# Altium PCB Sitara_Project_Rev_A_PCB.PcbDoc (part 1 of 9)
Units mm, origin at the board's own origin, x right, y up, seen from the top; angles counter-clockwise.
Board outline 120 x 85 mm, 8 copper layers (L1 (Sig), L2 (GND), L3 (PWR), L4 (Sig), L5 (GND), L6 (Sig), L7 (GND), L8 (Sig)), stack 1.188 mm thick; 458 components, 357 nets, 1916 pads, 1164 vias.
Unrouted connection lines stored in the file: 516.
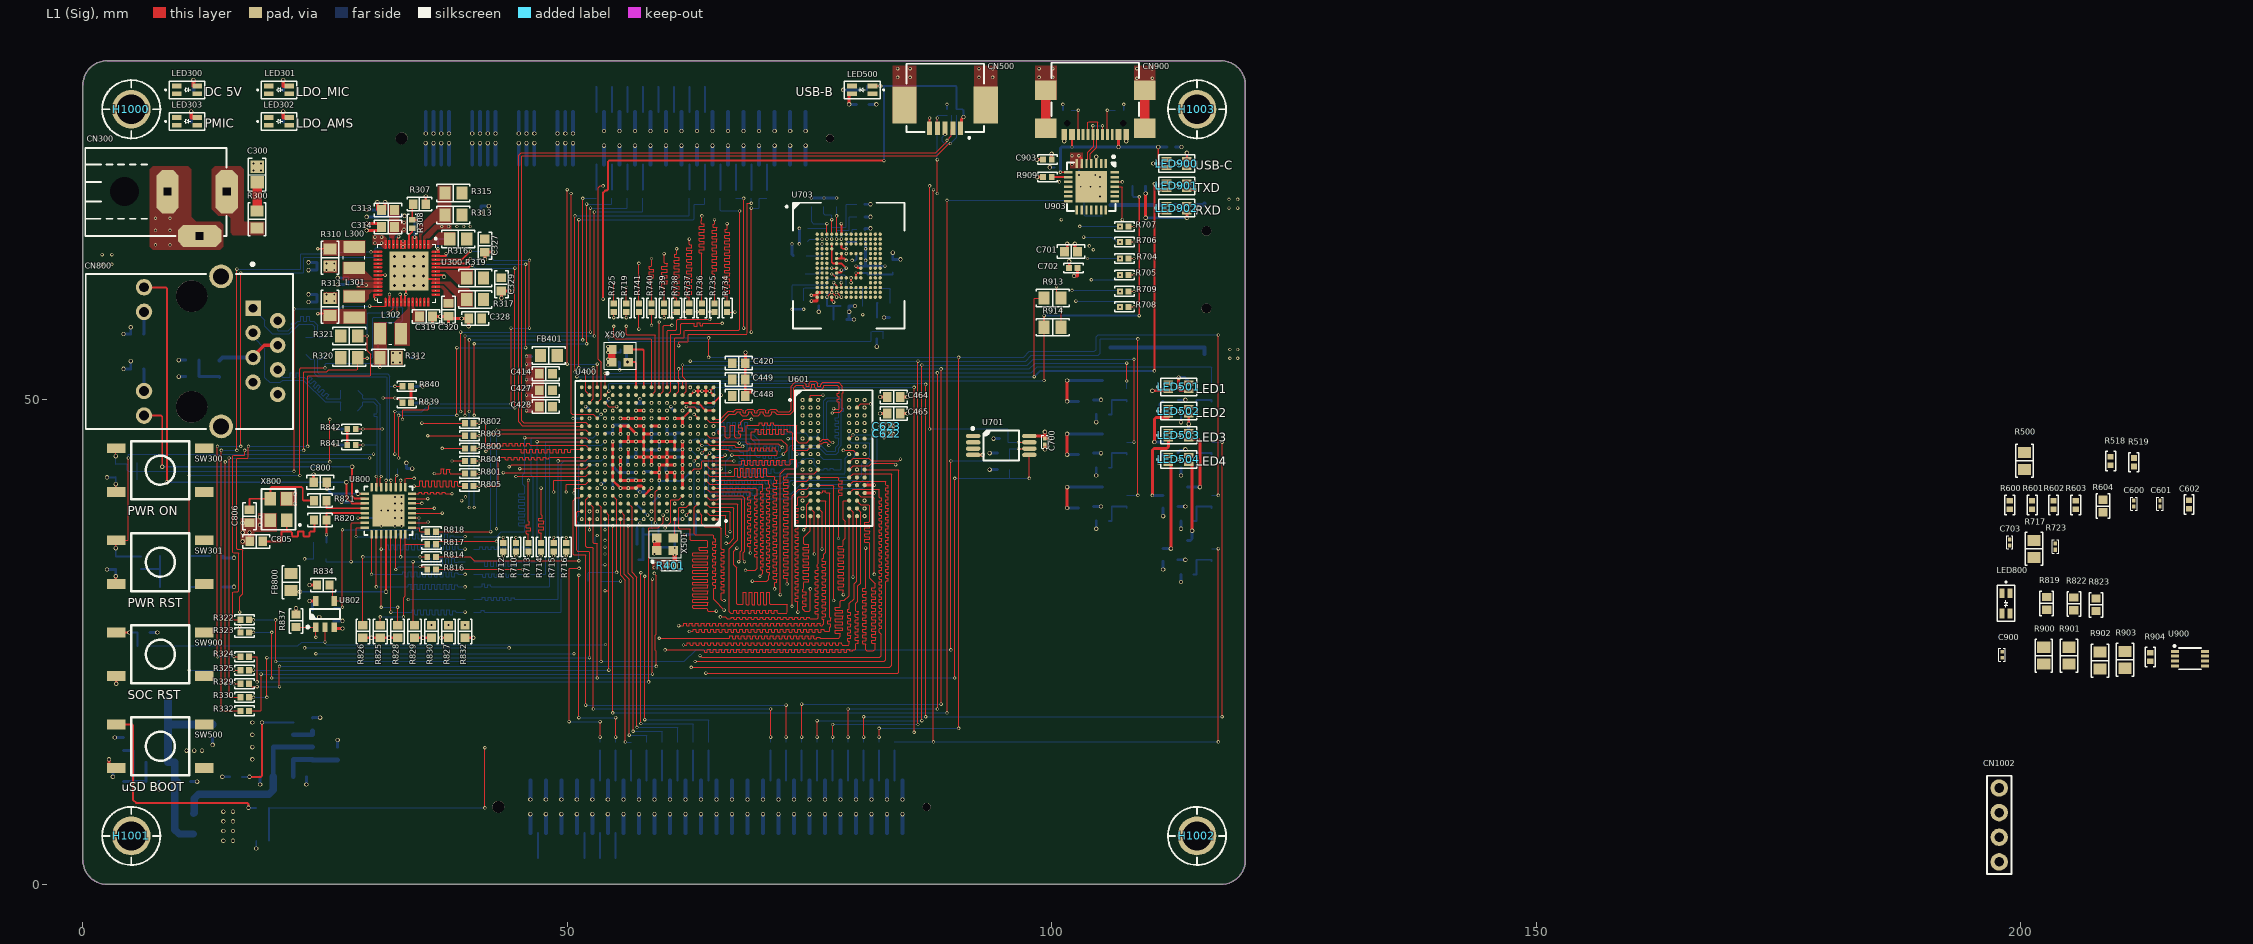
[diagram p0: L1 (Sig) view]
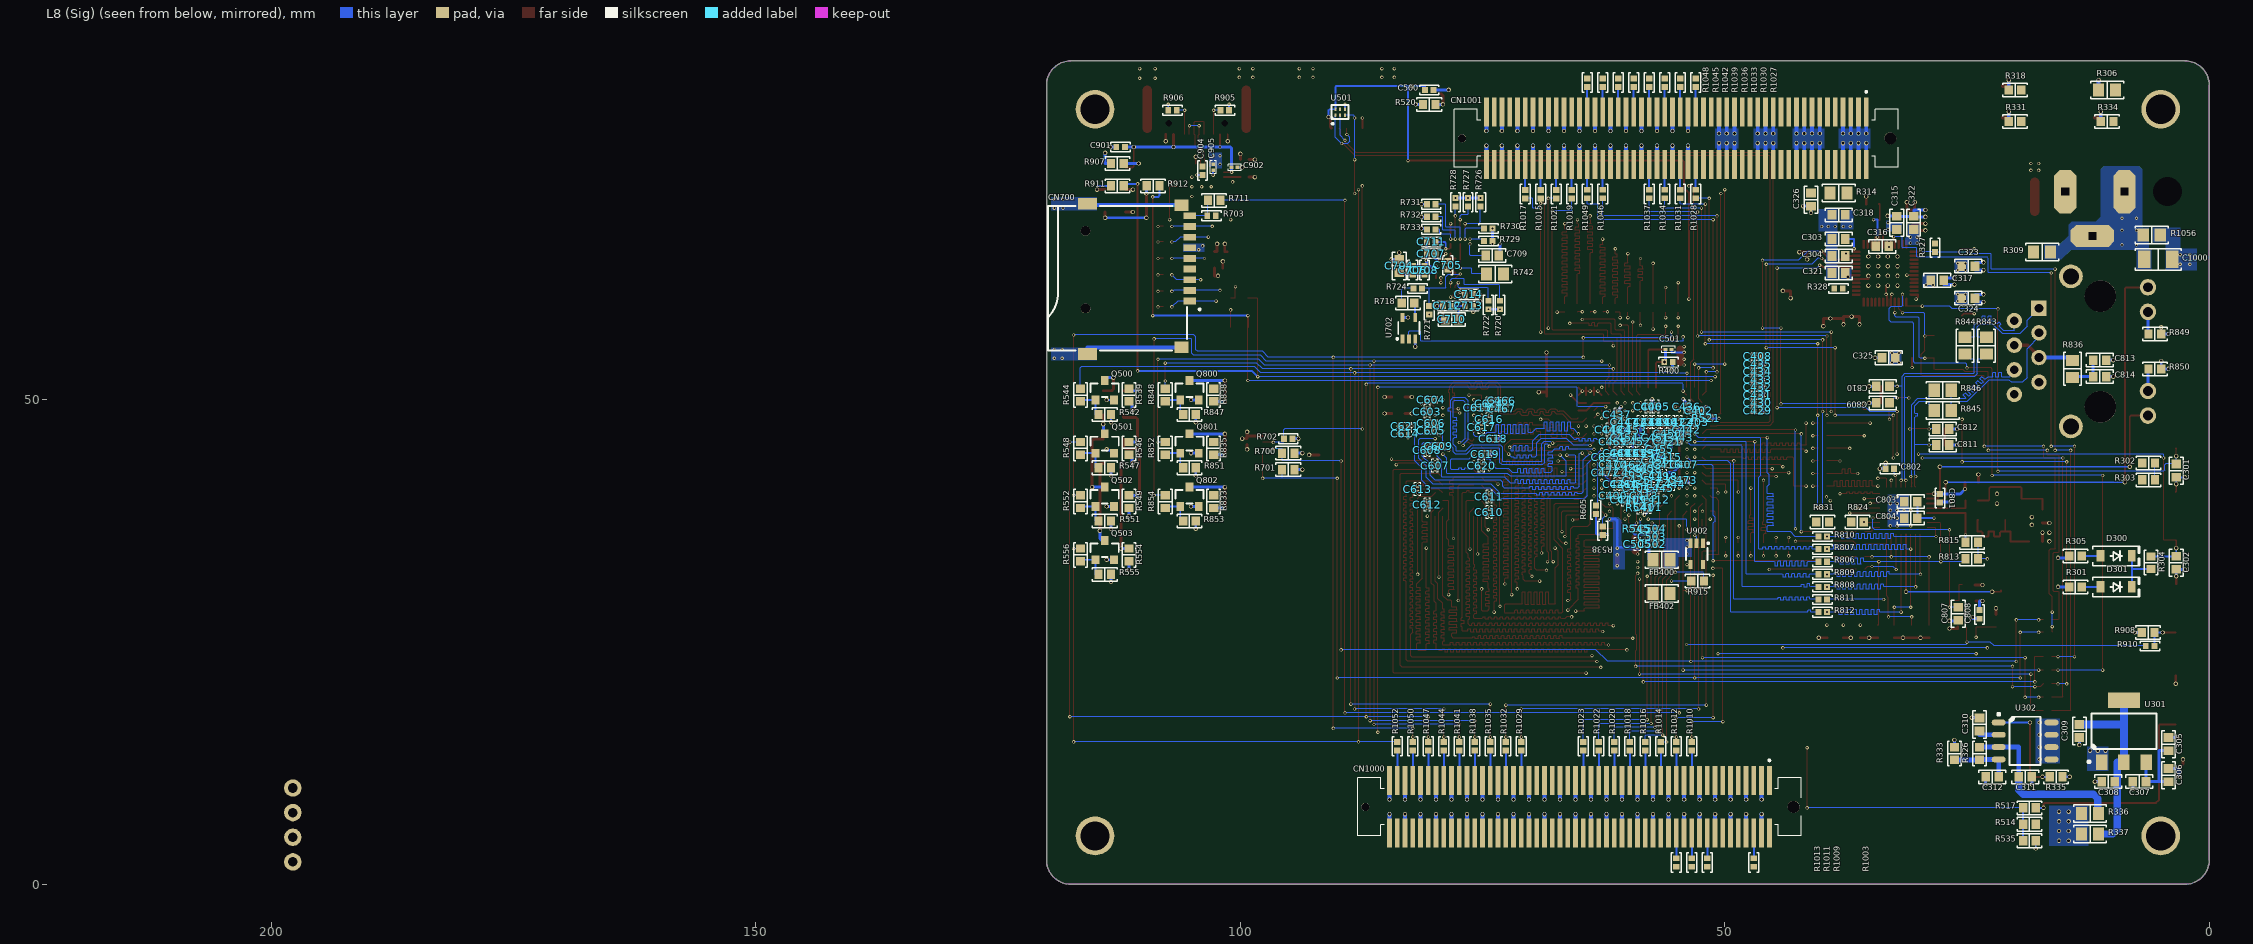
[diagram p1: L8 (Sig) view, seen from below]
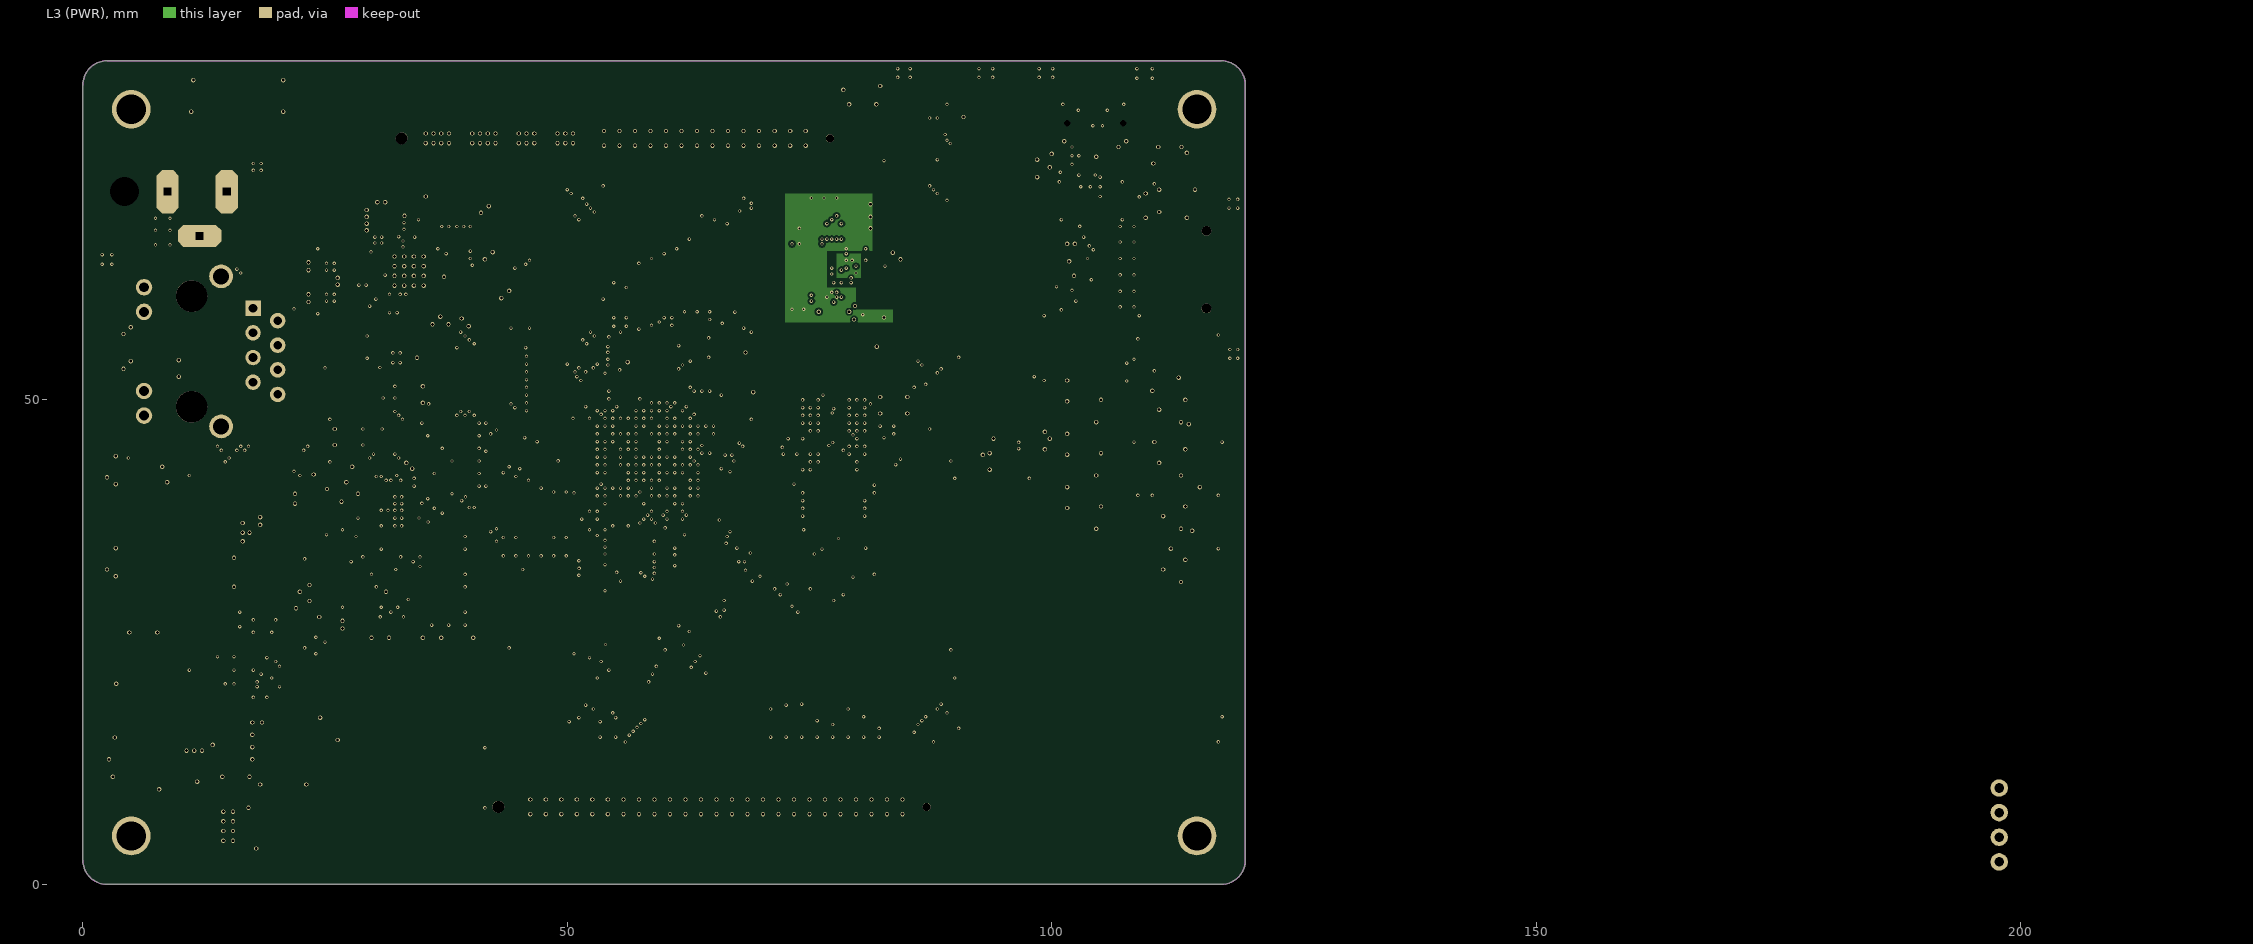
[diagram p2: L3 (PWR)]
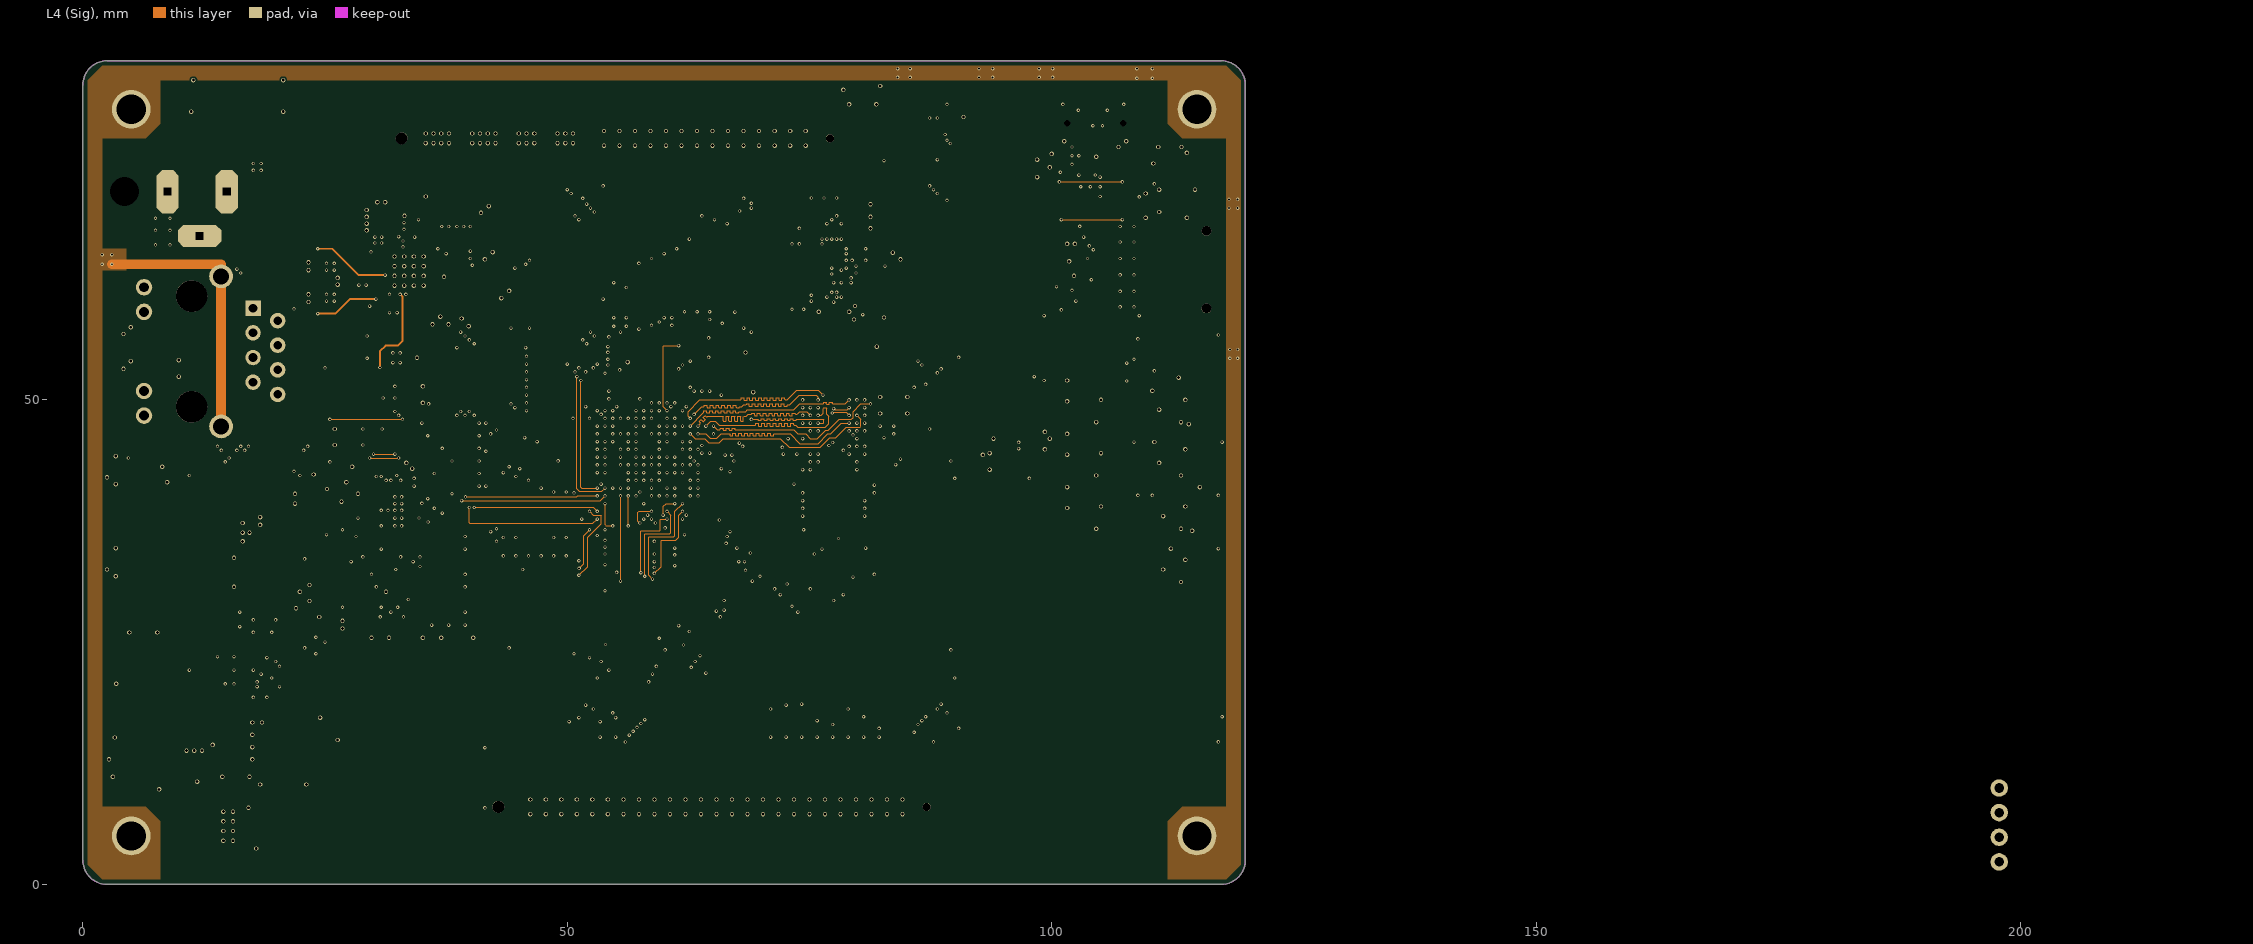
[diagram p3: L4 (Sig)]
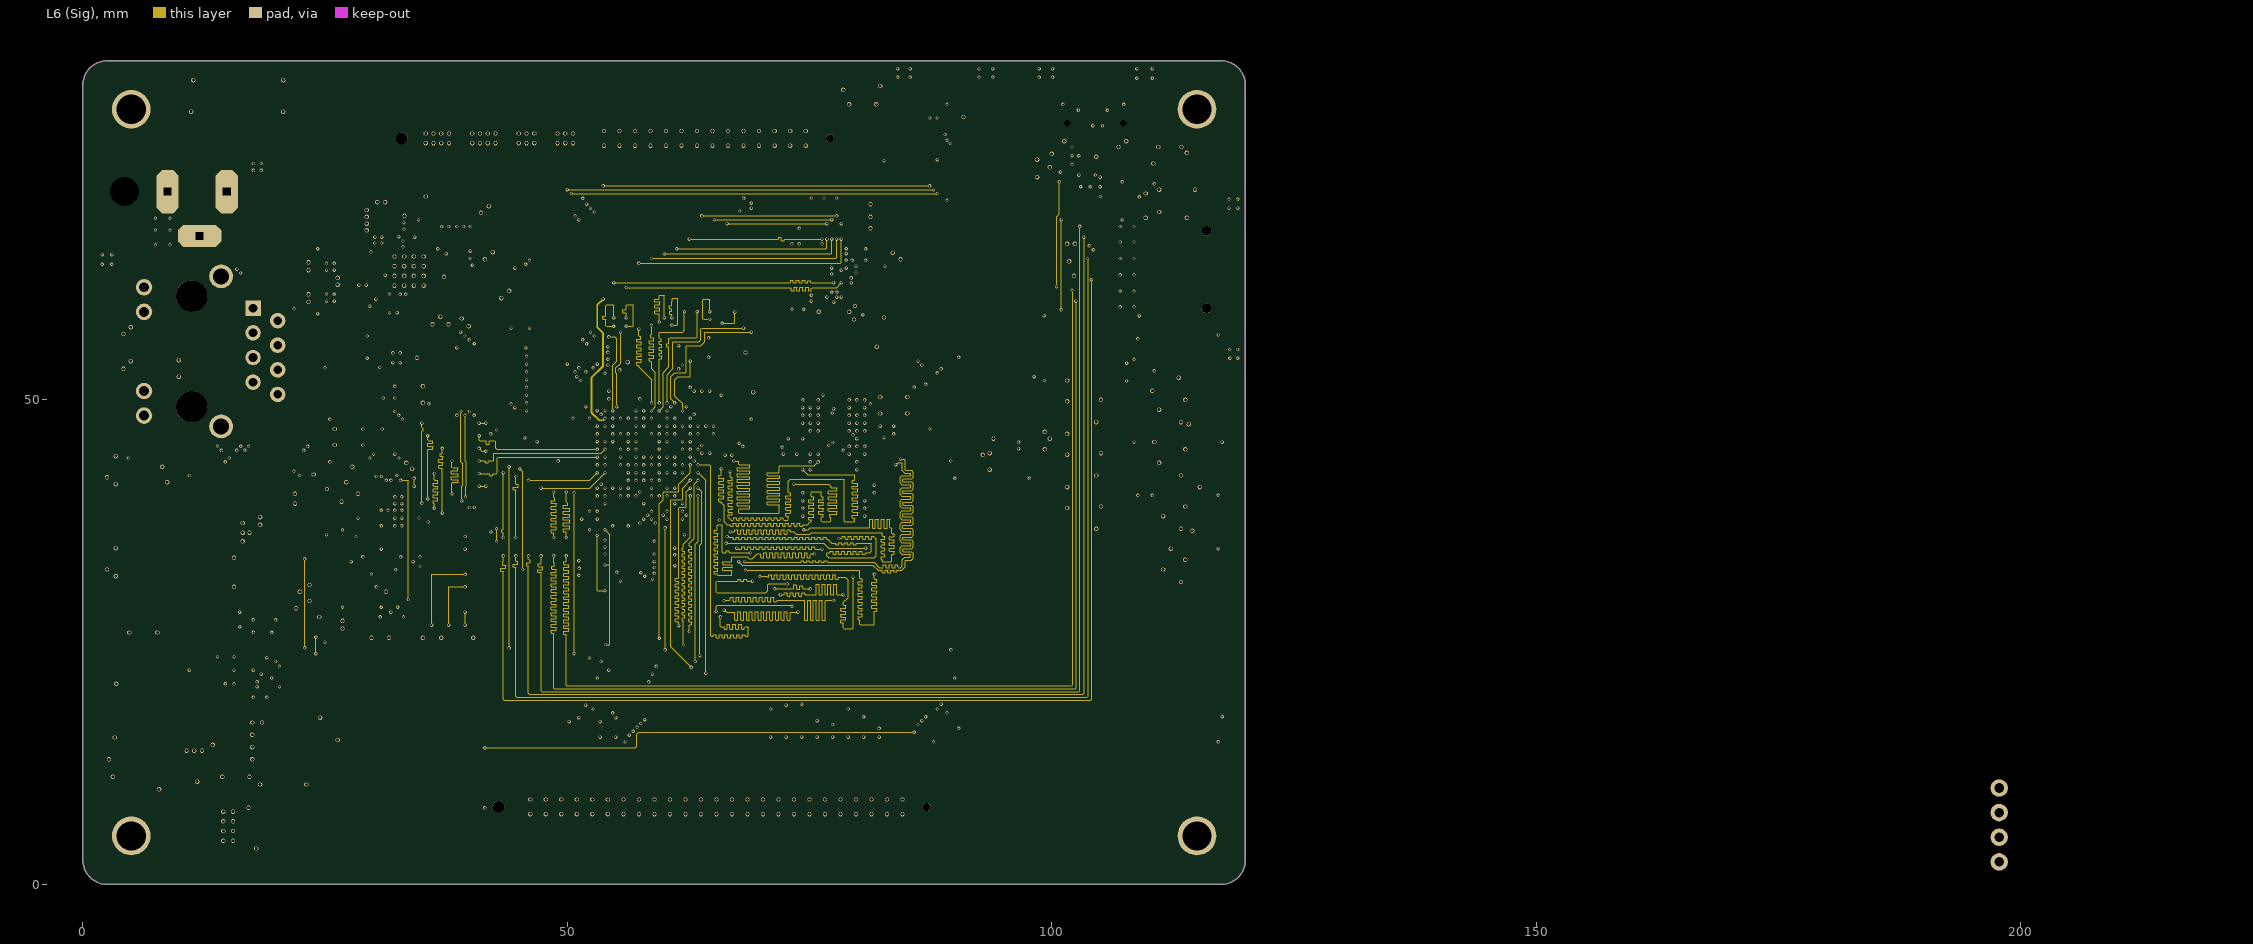
[diagram p4: L6 (Sig)]

## Layer stack, top to bottom
Top Mask: solder mask 0.015, Solder Resist, Dk 3.8
L1 (Sig): signal copper 0.035
Dielectric 1: prepreg 0.0764, 1080, Dk 3.91
L2 (GND): signal copper 0.0152
Core 1: core 0.1, FR-4, Dk 4.6
L3 (PWR): signal copper 0.0152
Dielectric 2: prepreg 0.2104, 7628, Dk 4.4
Dielectric 3: prepreg 0.0764, 1080, Dk 3.91
L4 (Sig): signal copper 0.0152
Core 2: core 0.1, FR-4, Dk 4.6
L5 (GND): signal copper 0.0152
Dielectric 4: prepreg 0.0764, 1080, Dk 3.91
Dielectric 5: prepreg 0.2104, 7628, Dk 4.4
L6 (Sig): signal copper 0.0152
Core 3: core 0.1, FR-4, Dk 4.6
L7 (GND): signal copper 0.0152
Dielectric 6: prepreg 0.0764, 1080, Dk 3.91
L8 (Sig): signal copper 0.035
Bottom Mask: solder mask 0.015, Solder Resist, Dk 3.8

## Board outline
2.5,0 cw(c2.5,2.5) 0,2.5 0,82.5 cw(c2.5,82.5) 2.5,85 117.5,85 cw(c117.5,82.5) 120,82.5 120,2.5 cw(c117.5,2.5) 117.5,0

## Design rules (kind name [scope] priority, off if disabled: settings)
BoardOutlineClearance [All] p1: gap=0.2 ignorepadtopadclearanceinfootprint=FALSE except(0.4: Arc-SplitBarrior Arc-SplitContinuation Track-SplitBarrior Track-SplitContinuation SMDPad-SplitBarrior SMDPad-SplitContinuation THPad-SplitBarrior THPad-SplitContinuation Via-SplitBarrior Via-SplitContinuation Fill-SplitBarrior Fill-SplitContinuation Poly-SplitBarrior Poly-SplitContinuation Region-SplitBarrior Region-SplitContinuation Text-SplitBarrior Text-SplitContinuation)
Clearance "Clearance Bottom Layer" [OnLayer('Bottom Layer')] p1: gap=0.203 ignorepadtopadclearanceinfootprint=TRUE except(0.254: Arc-Text Track-Text SMDPad-Text THPad-Text Via-Text Fill-Text Poly-Text Region-Text Text-Text)
Clearance "Clearance Top Layer" [OnLayer('Top Layer')] p2: gap=0.203 ignorepadtopadclearanceinfootprint=TRUE except(0.254: Arc-Text Track-Text SMDPad-Text THPad-Text Via-Text Fill-Text Poly-Text Region-Text Text-Text)
Clearance [All] p3: gap=0.2 ignorepadtopadclearanceinfootprint=FALSE except(0.1: Arc-Arc Arc-Track Arc-SMDPad Track-Track Track-SMDPad SMDPad-SMDPad; 0.127: Arc-Via Track-Via SMDPad-Via THPad-Via Via-Via; 0.198: Arc-Fill Arc-Poly Arc-Region Track-Fill Track-Poly Track-Region; 0.254: Arc-Text Track-Text SMDPad-Text THPad-Text Via-Text Fill-Text Fill-Hole Poly-Text Poly-Hole Region-Text Region-Hole Text-Text)
ComponentClearance [InComponent('C1000')] p1: gap=0.254 collisioncheckmode=3 verticalgap=0.254 showdistances=FALSE donotcheckwithout3dbody=TRUE
DiffPairsRouting [All] p1: maxlimit=0.254 minlimit=0.1 mostfreqgap=0.2 toplayer_minwidth=0.089 toplayer_maxwidth=0.4 toplayer_prefwidth=0.1 midlayer1_minwidth=0.089 midlayer1_maxwidth=0.4 midlayer1_prefwidth=0.1 midlayer2_minwidth=0.089 midlayer2_maxwidth=0.4 midlayer2_prefwidth=0.1 midlayer3_minwidth=0.089 midlayer3_maxwidth=0.4 midlayer3_prefwidth=0.1 midlayer4_minwidth=0.089 midlayer4_maxwidth=0.4 midlayer4_prefwidth=0.1 midlayer5_minwidth=0.089 midlayer5_maxwidth=0.4 midlayer5_prefwidth=0.1 midlayer6_minwidth=0.089 midlayer6_maxwidth=0.4 midlayer6_prefwidth=0.1 bottomlayer_minwidth=0.089 bottomlayer_maxwidth=0.4 bottomlayer_prefwidth=0.1 maxuncoupledlength=12.7
HoleSize [All] p1: absolutevalues=TRUE maxlimit=6.3 minlimit=0.2 maxpercent=80.000 minpercent=20.000
MatchedLengths "Schematic Matched Net Lengths_8" [InDifferentialPairClass('RJ45_RX')] p1: tolerance=25.4 checknetsindiffpair=TRUE checkdiffpairvsdiffpair=FALSE checkxsignals=FALSE checkothers=FALSE usedelayunits=TRUE delaytolerance=10.000000
MatchedLengths "Schematic Matched Net Lengths_7" [InNetClass('MII1_TX_AM3')] p2: tolerance=25.4 checknetsindiffpair=FALSE checkdiffpairvsdiffpair=TRUE checkxsignals=TRUE checkothers=TRUE usedelayunits=TRUE delaytolerance=10.000000
MatchedLengths "Schematic Matched Net Lengths_6" [InNetClass('MII1_TX_PHY')] p3: tolerance=25.4 checknetsindiffpair=FALSE checkdiffpairvsdiffpair=TRUE checkxsignals=TRUE checkothers=TRUE usedelayunits=TRUE delaytolerance=10.000000
MatchedLengths "Schematic Matched Net Lengths_5" [InNetClass('MMC1_eMMC')] p4: tolerance=25.4 checknetsindiffpair=FALSE checkdiffpairvsdiffpair=TRUE checkxsignals=TRUE checkothers=TRUE usedelayunits=TRUE delaytolerance=10.000000
MatchedLengths "Schematic Matched Net Lengths_4" [InNetClass('MMC1_AM3')] p5: tolerance=25.4 checknetsindiffpair=FALSE checkdiffpairvsdiffpair=TRUE checkxsignals=TRUE checkothers=TRUE usedelayunits=TRUE delaytolerance=10.000000
MatchedLengths "Schematic Matched Net Lengths_3" [InNetClass('MII1_RX_PHY')] p6: tolerance=25.4 checknetsindiffpair=FALSE checkdiffpairvsdiffpair=TRUE checkxsignals=TRUE checkothers=TRUE usedelayunits=TRUE delaytolerance=10.000000
MatchedLengths "Schematic Matched Net Lengths_2" [InNetClass('MII1_RX_AM3')] p7: tolerance=25.4 checknetsindiffpair=FALSE checkdiffpairvsdiffpair=TRUE checkxsignals=TRUE checkothers=TRUE usedelayunits=TRUE delaytolerance=10.000000
MatchedLengths "Schematic Matched Net Lengths_1" [InNetClass('MMC0_AM3')] p8: tolerance=25.4 checknetsindiffpair=FALSE checkdiffpairvsdiffpair=TRUE checkxsignals=TRUE checkothers=TRUE usedelayunits=TRUE delaytolerance=10.000000
MatchedLengths "Schematic Matched Net Lengths" [InDifferentialPairClass('RJ45_TX')] p9: tolerance=25.4 checknetsindiffpair=TRUE checkdiffpairvsdiffpair=FALSE checkxsignals=FALSE checkothers=FALSE usedelayunits=TRUE delaytolerance=10.000000
MatchedLengths MatchedLengths_DDR_CLOCKS_STROBES_3 [InxSignalClass('ADDR_PP1') OR InxSignalClass('DATA_BL0') OR InxSignalClass('DATA_BL1')] p10: tolerance=0 checknetsindiffpair=TRUE checkdiffpairvsdiffpair=FALSE checkxsignals=FALSE checkothers=FALSE
MatchedLengths MatchedLengths_DATA_BL1_4 [InxSignalClass('DATA_BL1')] p11: tolerance=0 checknetsindiffpair=FALSE checkdiffpairvsdiffpair=TRUE checkxsignals=TRUE checkothers=TRUE
MatchedLengths MatchedLengths_DATA_BL0_4 [InxSignalClass('DATA_BL0')] p12: tolerance=0 checknetsindiffpair=FALSE checkdiffpairvsdiffpair=TRUE checkxsignals=TRUE checkothers=TRUE
MatchedLengths MatchedLengths_ADDR_PP1_4 [InxSignalClass('ADDR_PP1')] p13: tolerance=0 checknetsindiffpair=FALSE checkdiffpairvsdiffpair=TRUE checkxsignals=TRUE checkothers=TRUE
MatchedLengths MatchedLengths_DDR_CLOCKS_STROBES_2 [InxSignalClass('ADDR_PP1') OR InxSignalClass('DATA_BL0') OR InxSignalClass('DATA_BL1')] p14: tolerance=0 checknetsindiffpair=TRUE checkdiffpairvsdiffpair=FALSE checkxsignals=FALSE checkothers=FALSE
MatchedLengths MatchedLengths_DATA_BL1_3 [InxSignalClass('DATA_BL1')] p15: tolerance=0 checknetsindiffpair=FALSE checkdiffpairvsdiffpair=TRUE checkxsignals=TRUE checkothers=TRUE
MatchedLengths MatchedLengths_DATA_BL0_3 [InxSignalClass('DATA_BL0')] p16: tolerance=0 checknetsindiffpair=FALSE checkdiffpairvsdiffpair=TRUE checkxsignals=TRUE checkothers=TRUE
MatchedLengths MatchedLengths_ADDR_PP1_3 [InxSignalClass('ADDR_PP1')] p17: tolerance=0 checknetsindiffpair=FALSE checkdiffpairvsdiffpair=TRUE checkxsignals=TRUE checkothers=TRUE
MatchedLengths MatchedLengths_DDR_CLOCKS_STROBES_1 [InxSignalClass('ADDR_PP1') OR InxSignalClass('DATA_BL0') OR InxSignalClass('DATA_BL1')] p18: tolerance=0 checknetsindiffpair=TRUE checkdiffpairvsdiffpair=FALSE checkxsignals=FALSE checkothers=FALSE
MatchedLengths MatchedLengths_DATA_BL1_2 [InxSignalClass('DATA_BL1')] p19: tolerance=0 checknetsindiffpair=FALSE checkdiffpairvsdiffpair=TRUE checkxsignals=TRUE checkothers=TRUE
MatchedLengths MatchedLengths_DATA_BL0_2 [InxSignalClass('DATA_BL0')] p20: tolerance=0 checknetsindiffpair=FALSE checkdiffpairvsdiffpair=TRUE checkxsignals=TRUE checkothers=TRUE
MatchedLengths MatchedLengths_ADDR_PP1_2 [InxSignalClass('ADDR_PP1')] p21: tolerance=0 checknetsindiffpair=FALSE checkdiffpairvsdiffpair=TRUE checkxsignals=TRUE checkothers=TRUE
MatchedLengths "Schematic Matched Net Lengths_19" [InNetClass('DDR_BL1')] p22: tolerance=25.4 checknetsindiffpair=FALSE checkdiffpairvsdiffpair=TRUE checkxsignals=TRUE checkothers=TRUE usedelayunits=TRUE delaytolerance=10.000000
MatchedLengths "Schematic Matched Net Lengths_18" [InDifferentialPairClass('PHY_TX')] p23: tolerance=25.4 checknetsindiffpair=TRUE checkdiffpairvsdiffpair=FALSE checkxsignals=FALSE checkothers=FALSE usedelayunits=TRUE delaytolerance=10.000000
MatchedLengths "Schematic Matched Net Lengths_16" [InNetClass('DDR_BL0')] p24: tolerance=25.4 checknetsindiffpair=FALSE checkdiffpairvsdiffpair=TRUE checkxsignals=TRUE checkothers=TRUE usedelayunits=TRUE delaytolerance=10.000000
MatchedLengths "Schematic Matched Net Lengths_15" [InNetClass('MMC0_MICRO_SD')] p25: tolerance=25.4 checknetsindiffpair=FALSE checkdiffpairvsdiffpair=TRUE checkxsignals=TRUE checkothers=TRUE usedelayunits=TRUE delaytolerance=10.000000
MatchedLengths "Schematic Matched Net Lengths_12" [InDifferentialPairClass('PHY_RX')] p26: tolerance=25.4 checknetsindiffpair=TRUE checkdiffpairvsdiffpair=FALSE checkxsignals=FALSE checkothers=FALSE usedelayunits=TRUE delaytolerance=10.000000
MatchedLengths "Schematic Matched Net Lengths_11" [InNetClass('DDR_ACC')] p27: tolerance=25.4 checknetsindiffpair=FALSE checkdiffpairvsdiffpair=TRUE checkxsignals=TRUE checkothers=TRUE usedelayunits=TRUE delaytolerance=10.000000
MatchedLengths MatchedLengths_DDR_CLOCKS_STROBES [InxSignalClass('ADDR_PP1') OR InxSignalClass('DATA_BL0') OR InxSignalClass('DATA_BL1')] p28: tolerance=0 checknetsindiffpair=TRUE checkdiffpairvsdiffpair=FALSE checkxsignals=FALSE checkothers=FALSE
MatchedLengths MatchedLengths_DATA_BL1_1 [InxSignalClass('DATA_BL1')] p29: tolerance=0 checknetsindiffpair=FALSE checkdiffpairvsdiffpair=TRUE checkxsignals=TRUE checkothers=TRUE
MatchedLengths MatchedLengths_DATA_BL0_1 [InxSignalClass('DATA_BL0')] p30: tolerance=0 checknetsindiffpair=FALSE checkdiffpairvsdiffpair=TRUE checkxsignals=TRUE checkothers=TRUE
MatchedLengths MatchedLengths_ADDR_PP1_1 [InxSignalClass('ADDR_PP1')] p31: tolerance=0 checknetsindiffpair=FALSE checkdiffpairvsdiffpair=TRUE checkxsignals=TRUE checkothers=TRUE
MatchedLengths MatchLengths_xSignals_U400_U601 [InxSignalClass('xSignals_U400_U601_MatchLengthsClass')] p32: tolerance=2.54 checknetsindiffpair=FALSE checkdiffpairvsdiffpair=TRUE checkxsignals=TRUE checkothers=TRUE
MatchedLengths MatchedLengths_DDR_CLOCKS_STROBES2 [InxSignalClass('ADDR_PP1_1') OR InxSignalClass('DATA_BL0') OR InxSignalClass('DATA_BL1')] p33: tolerance=0 checknetsindiffpair=TRUE checkdiffpairvsdiffpair=FALSE checkxsignals=FALSE checkothers=FALSE usedelayunits=TRUE delaytolerance=1.000000
MatchedLengths MatchedLengths_DATA_BL1 [InxSignalClass('DATA_BL1')] p34: tolerance=0 checknetsindiffpair=FALSE checkdiffpairvsdiffpair=TRUE checkxsignals=TRUE checkothers=TRUE usedelayunits=TRUE delaytolerance=10.000000
MatchedLengths MatchedLengths_DATA_BL0 [InxSignalClass('DATA_BL0')] p35: tolerance=0 checknetsindiffpair=FALSE checkdiffpairvsdiffpair=TRUE checkxsignals=TRUE checkothers=TRUE usedelayunits=TRUE delaytolerance=10.000000
MatchedLengths MatchedLengths_ADDR_PP2 [InxSignalClass('ADDR_PP2')] p36: tolerance=0 checknetsindiffpair=FALSE checkdiffpairvsdiffpair=TRUE checkxsignals=TRUE checkothers=TRUE usedelayunits=TRUE delaytolerance=10.000000
MatchedLengths MatchedLengths_DDR_CLOCKS_STROBES1 [InxSignalClass('ADDR_PP1') OR InxSignalClass('DATA_BL0') OR InxSignalClass('DATA_BL1')] p37: tolerance=0 checknetsindiffpair=TRUE checkdiffpairvsdiffpair=FALSE checkxsignals=FALSE checkothers=FALSE usedelayunits=TRUE delaytolerance=1.000000
MatchedLengths MatchedLengths_DATA_BL3 [InxSignalClass('DATA_BL3')] p38: tolerance=0 checknetsindiffpair=FALSE checkdiffpairvsdiffpair=TRUE checkxsignals=TRUE checkothers=TRUE usedelayunits=TRUE delaytolerance=10.000000
MatchedLengths MatchedLengths_DATA_BL2 [InxSignalClass('DATA_BL2')] p39: tolerance=0 checknetsindiffpair=FALSE checkdiffpairvsdiffpair=TRUE checkxsignals=TRUE checkothers=TRUE usedelayunits=TRUE delaytolerance=10.000000
MatchedLengths MatchedLengths_ADDR_PP1 [InxSignalClass('ADDR_PP1')] p40: tolerance=0 checknetsindiffpair=FALSE checkdiffpairvsdiffpair=TRUE checkxsignals=TRUE checkothers=TRUE usedelayunits=TRUE delaytolerance=10.000000
MinimumAnnularRing [All] p1: minimumring=0.076
MinimumSolderMaskSliver [All] p1: minsoldermaskwidth=0.1
PolygonConnect Default [All] p1: connectstyle=Direct reliefconductorwidth=0.508 reliefentries=4 polygonreliefangle="90 Angle" airgapwidth=0.254
RoutingCorners [All] p1: cornerstyle=Round minsetback=2.54 maxsetback=2.54
RoutingTopology RoutingTopology_DDRAddressAndControls [InNetClass('DDR_AddressAndControls')] p1: topology=Daisy_Simple
RoutingTopology [All] p2: topology=Shortest
RoutingVias [All] p1: holewidth=0.2 width=0.35 viastyle="Through Hole" minholewidth=0.2 minwidth=0.25 maxholewidth=1 maxwidth=2
SilkToSilkClearance [All] p1: silktosilkclearance=0.1
SilkToSolderMaskClearance [IsPad] p1: minsilkscreentomaskgap=0.1 clearancetoexposedcopper=TRUE
SolderMaskExpansion [All] p1: expansion=0.102 istentingtop=FALSE
SupplyNets "Schematic Supply Nets_27" [InNet('CGND')] p1: voltage=0.000
SupplyNets "Schematic Supply Nets_26" [InNet('DP1.1V_MPU')] p2: voltage=0.000
SupplyNets "Schematic Supply Nets_25" [InNet('DP1.5V_DDR')] p3: voltage=0.000
SupplyNets "Schematic Supply Nets_24" [InNet('VDD_ADC')] p4: voltage=0.000
SupplyNets "Schematic Supply Nets_23" [InNet('DP3.3VS_B')] p5: voltage=0.000
SupplyNets "Schematic Supply Nets_22" [InNet('VDD_PLL')] p6: voltage=0.000
SupplyNets "Schematic Supply Nets_21" [InNet('DP1.8VS')] p7: voltage=0.000
SupplyNets "Schematic Supply Nets_20" [InNet('DP1.8VS_eMMC')] p8: voltage=0.000
SupplyNets "Schematic Supply Nets_19" [InNet('DP1.8V_VDDS')] p9: voltage=0.000
SupplyNets "Schematic Supply Nets_18" [InNet('GNDPWR')] p10: voltage=0.000
SupplyNets "Schematic Supply Nets_17" [InNet('USB_5VS')] p11: voltage=0.000
SupplyNets "Schematic Supply Nets_16" [InNet('DGND')] p12: voltage=0.000
SupplyNets "Schematic Supply Nets_15" [InNet('DP1.1V_CORE')] p13: voltage=0.000
SupplyNets "Schematic Supply Nets_14" [InNet('GNDADC')] p14: voltage=0.000
SupplyNets "Schematic Supply Nets_13" [InNet('IN5VS')] p15: voltage=0.000
SupplyNets "Schematic Supply Nets_12" [InNet('DDR_VREF')] p16: voltage=0.000
SupplyNets "Schematic Supply Nets_11" [InNet('DP3.3VS_MIC')] p17: voltage=0.000
SupplyNets "Schematic Supply Nets_10" [InNet('DP5VS')] p18: voltage=0.000
SupplyNets "Schematic Supply Nets_9" [InNet('DP3.3VS_AMS')] p19: voltage=0.000
SupplyNets "Schematic Supply Nets_8" [InNet('DP3.3VS_PHY')] p20: voltage=0.000
SupplyNets "Schematic Supply Nets_7" [InNet('DP1.8V_VRTC')] p21: voltage=0.000
SupplyNets "Schematic Supply Nets_6" [InNet('USB0_VBUS')] p22: voltage=0.000
SupplyNets "Schematic Supply Nets_5" [InNet('DP3.3VS_C')] p23: voltage=0.000
SupplyNets "Schematic Supply Nets_4" [InNet('DP1.8V_VIO')] p24: voltage=0.000
SupplyNets "Schematic Supply Nets_3" [InNet('USB9_VBUS')] p25: voltage=0.000
SupplyNets "Schematic Supply Nets_2" [InNet('GNDOSC1')] p26: voltage=0.000
SupplyNets "Schematic Supply Nets_1" [InNet('DP3.3VS_A')] p27: voltage=0.000
SupplyNets "Schematic Supply Nets" [InNet('GNDOSC0')] p28: voltage=0.000
Width [All] p1: maxlimit=2.54 minlimit=0.089 preferedwidth=0.2
22 further rules are at their usual default settings.

## Classes and differential pairs
differential pair class RJ45_TX: RJ45_TX
differential pair class RJ45_RX: RJ45_RX
net class MMC1_AM3: MMC1_CLK MMC1_CMD MMC1_DAT0 MMC1_DAT1 MMC1_DAT2 MMC1_DAT3 MMC1_DAT4 MMC1_DAT5 MMC1_DAT6 MMC1_DAT7
net class MMC0_AM3: MMC0_CLK MMC0_CMD MMC0_DAT0 MMC0_DAT1 MMC0_DAT2 MMC0_DAT3
net class MII1_TX_PHY: PHY_TXCLK PHY_TXD0 PHY_TXD1 PHY_TXD2 PHY_TXD3 PHY_TXEN
net class MII1_RX_AM3: MII1_RXCLK MII1_RXD0 MII1_RXD1 MII1_RXD2 MII1_RXD3 MII1_RXDV MII1_RXER
differential pair class USB_Mini_B_DIFF90: USB0_D
differential pair class USB9_DIFF90: USB9_D
differential pair class PHY_TX: PHY_TX
differential pair class PHY_RX: PHY_RX
differential pair class DIFF_DDR_DQS1: DDR_DQS1
differential pair class DIFF_DDR_DQS0: DDR_DQS0
differential pair class DIFF_DDR_CK: DDR_CK
net class MMC1_eMMC: eMMC_CLK eMMC_CMD eMMC_DAT0 eMMC_DAT1 eMMC_DAT2 eMMC_DAT3 eMMC_DAT4 eMMC_DAT5 eMMC_DAT6 eMMC_DAT7
net class MMC0_MICRO_SD: MICRO_SD_CLK MICRO_SD_CMD MICRO_SD_DAT0 MICRO_SD_DAT1 MICRO_SD_DAT2 MICRO_SD_DAT3
net class MII1_TX_AM3: MII1_TXCLK MII1_TXD0 MII1_TXD1 MII1_TXD2 MII1_TXD3 MII1_TXEN
net class MII1_RX_PHY: PHY_RXCLK PHY_RXD0/MODE0 PHY_RXD1/MODE1 PHY_RXD2/RMIISEL PHY_RXD3/PHYAD2 PHY_RXDV PHY_RXER/PHYAD0
net class DDR_BL1: DDR_DQ8 DDR_DQ9 DDR_DQ10 DDR_DQ11 DDR_DQ12 DDR_DQ13 DDR_DQ14 DDR_DQ15 DDR_DQM1 DDR_DQS1_N DDR_DQS1_P
net class DDR_BL0: DDR_DQ0 DDR_DQ1 DDR_DQ2 DDR_DQ3 DDR_DQ4 DDR_DQ5 DDR_DQ6 DDR_DQ7 DDR_DQM0 DDR_DQS0_N DDR_DQS0_P
net class DDR_ACC: DDR_A0 DDR_A1 DDR_A2 DDR_A3 DDR_A4 DDR_A5 DDR_A6 DDR_A7 DDR_A8 DDR_A9 DDR_A10 DDR_A11 DDR_A12 DDR_A13 DDR_A14 DDR_A15 DDR_BA0 DDR_BA1 DDR_BA2 DDR_CK_N DDR_CK_P DDR_CKE DDR_NCAS DDR_NCS DDR_NRAS DDR_NRST DDR_NWE DDR_ODT
differential pair RJ45_TX: +RJ45_TX_P -RJ45_TX_N
differential pair RJ45_RX: +RJ45_RX_P -RJ45_RX_N
differential pair USB9_D: +USB9_D_P -USB9_D_N
differential pair USB0_D: +USB0_D_P -USB0_D_N
differential pair PHY_TX: +PHY_TX_P -PHY_TX_N
differential pair PHY_RX: +PHY_RX_P -PHY_RX_N
differential pair DDR_DQS1: +DDR_DQS1_P -DDR_DQS1_N
differential pair DDR_DQS0: +DDR_DQS0_P -DDR_DQS0_N
differential pair DDR_CK: +DDR_CK_P -DDR_CK_N

## Components (designator, comment, footprint, x,y, rotation, side; value= is the part's Value field where it differs from the comment)
C300 "22uF/25V/2012" "CAP 2012 (0805_INCH)" 18,73.25 r270 top
C301 "100nF/50V/1608" "CAP 1608 (0603_INCH)" 3.4,42.7 r90 bottom
C302 "100nF/50V/1608" "CAP 1608 (0603_INCH)" 3.4,33.2 r90 bottom
C303 "100nF/50V/1608" "CAP 1608 (0603_INCH)" 38.25,66.6 r180 bottom
C304 "10uF/25V/1608" "CAP 1608 (0603_INCH)" 38.25,64.85 r0 bottom
C305 "10uF/10V/1608" "CAP 1608 (0603_INCH)" 4.2,14.475 r270 bottom
C306 "2.2uF/16V/1608" "CAP 1608 (0603_INCH)" 4.2,11.275 r270 bottom
C307 "100nF/50V/1608" "CAP 1608 (0603_INCH)" 7.2,10.6 r180 bottom
C308 "100nF/50V/1608" "CAP 1608 (0603_INCH)" 10.425,10.6 r180 bottom
C309 "10uF/10V/1608" "CAP 1608 (0603_INCH)" 13.4,15.825 r90 bottom
C310 "2.2uF/16V/1608" "CAP 1608 (0603_INCH)" 23.7,16.5 r270 bottom
C311 "100nF/50V/1608" "CAP 1608 (0603_INCH)" 18.975,11.1 r0 bottom
C312 "470pF/50V/1608" "CAP 1608 (0603_INCH)" 22.4,11.1 r180 bottom
C313 "10uF/25V/1608" "CAP 1608 (0603_INCH)" 31.5,69.6 r0 top
C314 "1uF/50V/1608" "CAP 1608 (0603_INCH)" 31.5,67.85 r0 top
C315 "100nF/50V/1608" "CAP 1608 (0603_INCH)" 32.25,68.275 r270 bottom
C316 "10uF/25V/1608" "CAP 1608 (0603_INCH)" 33.75,65.85 r180 bottom
C317 "10uF/25V/1608" "CAP 1608 (0603_INCH)" 28.075,62.35 r0 bottom
C318 "10uF/25V/1608" "CAP 1608 (0603_INCH)" 38.25,69.1 r180 bottom
C319 "10uF/25V/1608" "CAP 1608 (0603_INCH)" 35.425,58.6 r180 top
C320 "10uF/25V/1608" "CAP 1608 (0603_INCH)" 37.75,59.3 r90 top
C321 "10uF/25V/1608" "CAP 1608 (0603_INCH)" 38.25,63.1 r180 bottom
C322 "10uF/25V/1608" "CAP 1608 (0603_INCH)" 30.5,68.275 r270 bottom
C323 "10uF/25V/1608" "CAP 1608 (0603_INCH)" 24.85,63.8 r0 bottom
C324 "10uF/25V/1608" "CAP 1608 (0603_INCH)" 24.85,60.5 r0 bottom
C325 "10uF/25V/1608" "CAP 1608 (0603_INCH)" 33.085,54.35 r180 bottom
C326 "2.2uF/16V/1608" "CAP 1608 (0603_INCH)" 41.1,70.675 r90 bottom
C327 "2.2uF/16V/1608" "CAP 1608 (0603_INCH)" 41.5,65.925 r90 top
C328 "10uF/25V/1608" "CAP 1608 (0603_INCH)" 40.5,58.4 r0 top
C329 "10uF/25V/1608" "CAP 1608 (0603_INCH)" 43.2,61.925 r90 top
C400 "1uF/16V/0603" "CAP 0603 (0201_INCH)" 61.5,40.1 r0 bottom
C401 "1uF/16V/0603" "CAP 0603 (0201_INCH)" 57.9,38.9 r270 bottom
C402 "100nF/25V/0603" "CAP 0603 (0201_INCH)" 52.7,48.9 r0 bottom
C403 "100nF/25V/0603" "CAP 0603 (0201_INCH)" 53.1,47.7 r270 bottom
C404 "100nF/25V/0603" "CAP 0603 (0201_INCH)" 59.11,40.9 r180 bottom
C405 "1uF/16V/0603" "CAP 0603 (0201_INCH)" 57.1,49.3 r270 bottom
C406 "100nF/25V/0603" "CAP 0603 (0201_INCH)" 57.9,49.3 r270 bottom
C407 "100nF/25V/0603" "CAP 0603 (0201_INCH)" 54.2,43.3 r180 bottom
C408 "100nF/25V/0603" "CAP 0603 (0201_INCH)" 46.61,54.5 r0 bottom
C409 "100nF/25V/0603" "CAP 0603 (0201_INCH)" 59.5,39.7 r90 bottom
C410 "100nF/25V/0603" "CAP 0603 (0201_INCH)" 60.3,41.3 r270 bottom
C411 "100nF/25V/0603" "CAP 0603 (0201_INCH)" 60.3,39.7 r90 bottom
C412 "1uF/16V/0603" "CAP 0603 (0201_INCH)" 57.1,39.69 r270 bottom
C413 "1uF/16V/0603" "CAP 0603 (0201_INCH)" 58.3,40.1 r180 bottom
C414 "10uF/25V/1608" "CAP 1608 (0603_INCH)" 47.8,52.7 r0 top
C415 "100nF/25V/0603" "CAP 0603 (0201_INCH)" 55.89,44.1 r180 bottom
C416 "100nF/25V/0603" "CAP 0603 (0201_INCH)" 55.89,43.3 r180 bottom
C417 "100nF/25V/0603" "CAP 0603 (0201_INCH)" 57.9,41.3 r90 bottom
C418 "100nF/25V/0603" "CAP 0603 (0201_INCH)" 56.289,42.127 r270 bottom
C419 "100nF/25V/0603" "CAP 0603 (0201_INCH)" 57.1,42.1 r270 bottom
C420 "10uF/25V/1608" "CAP 1608 (0603_INCH)" 67.7,53.8 r180 top
C421 "100nF/25V/0603" "CAP 0603 (0201_INCH)" 55.89,45.7 r180 bottom
C422 "100nF/25V/0603" "CAP 0603 (0201_INCH)" 54.7,47.69 r90 bottom
C423 "100nF/25V/0603" "CAP 0603 (0201_INCH)" 58.7,47.71 r90 bottom
C424 "100nF/25V/0603" "CAP 0603 (0201_INCH)" 61.1,46.9 r90 bottom
C425 "100nF/25V/0603" "CAP 0603 (0201_INCH)" 59.11,41.7 r180 bottom
C426 "100nF/25V/0603" "CAP 0603 (0201_INCH)" 61.1,41.31 r270 bottom
C427 "10uF/25V/1608" "CAP 1608 (0603_INCH)" 47.8,51 r0 top
C428 "10uF/25V/1608" "CAP 1608 (0603_INCH)" 47.8,49.3 r0 top
C429 "100nF/25V/0603" "CAP 0603 (0201_INCH)" 46.6,48.9 r0 bottom
C430 "100nF/25V/0603" "CAP 0603 (0201_INCH)" 46.61,49.7 r0 bottom
C431 "100nF/25V/0603" "CAP 0603 (0201_INCH)" 46.61,50.5 r0 bottom
C432 "100nF/25V/0603" "CAP 0603 (0201_INCH)" 46.61,51.3 r0 bottom
C433 "100nF/25V/0603" "CAP 0603 (0201_INCH)" 46.61,52.1 r0 bottom
C434 "100nF/25V/0603" "CAP 0603 (0201_INCH)" 46.61,52.9 r0 bottom
C435 "100nF/25V/0603" "CAP 0603 (0201_INCH)" 46.61,53.7 r0 bottom
C436 "100nF/25V/0603" "CAP 0603 (0201_INCH)" 53.9,49.3 r270 bottom
C437 "100nF/25V/0603" "CAP 0603 (0201_INCH)" 61.1,48.49 r270 bottom
C438 "100nF/25V/0603" "CAP 0603 (0201_INCH)" 57.9,47.71 r90 bottom
C439 "100nF/25V/0603" "CAP 0603 (0201_INCH)" 57.1,47.71 r90 bottom
C440 "100nF/25V/0603" "CAP 0603 (0201_INCH)" 56.3,47.71 r90 bottom
C441 "100nF/25V/0603" "CAP 0603 (0201_INCH)" 55.5,47.71 r90 bottom
C442 "100nF/25V/0603" "CAP 0603 (0201_INCH)" 53.9,46.91 r90 bottom
C443 "100nF/25V/0603" "CAP 0603 (0201_INCH)" 54.7,46.1 r270 bottom
C444 "100nF/25V/0603" "CAP 0603 (0201_INCH)" 55.5,41.29 r270 bottom
C445 "100nF/25V/0603" "CAP 0603 (0201_INCH)" 56.69,40.9 r180 bottom
C446 "100nF/25V/0603" "CAP 0603 (0201_INCH)" 61.9,46.91 r90 bottom
C447 "100nF/25V/0603" "CAP 0603 (0201_INCH)" 60.3,47.71 r90 bottom
C448 "10uF/25V/1608" "CAP 1608 (0603_INCH)" 67.7,50.4 r180 top
C449 "10uF/25V/1608" "CAP 1608 (0603_INCH)" 67.7,52.1 r180 top
C450 "100nF/25V/0603" "CAP 0603 (0201_INCH)" 55.9,46.5 r180 bottom
C451 "100nF/25V/0603" "CAP 0603 (0201_INCH)" 57.1,46.1 r90 bottom
C452 "100nF/25V/0603" "CAP 0603 (0201_INCH)" 59.11,45.7 r0 bottom
C453 "100nF/25V/0603" "CAP 0603 (0201_INCH)" 59.5,46.89 r90 bottom
C454 "100nF/25V/0603" "CAP 0603 (0201_INCH)" 60.3,46.1 r270 bottom
C455 "100nF/25V/0603" "CAP 0603 (0201_INCH)" 56.7,44.9 r180 bottom
C456 "100nF/25V/0603" "CAP 0603 (0201_INCH)" 57.1,43.7 r270 bottom
C457 "100nF/25V/0603" "CAP 0603 (0201_INCH)" 57.9,44.5 r90 bottom
C458 "100nF/25V/0603" "CAP 0603 (0201_INCH)" 57.9,42.9 r270 bottom
C459 "100nF/25V/0603" "CAP 0603 (0201_INCH)" 58.7,44.51 r90 bottom
C460 "100nF/25V/0603" "CAP 0603 (0201_INCH)" 58.7,42.9 r270 bottom
C461 "100nF/25V/0603" "CAP 0603 (0201_INCH)" 59.5,44.5 r90 bottom
C462 "100nF/25V/0603" "CAP 0603 (0201_INCH)" 59.89,43.3 r0 bottom
C463 "100nF/25V/0603" "CAP 0603 (0201_INCH)" 59.89,42.5 r0 bottom
C464 "10uF/25V/1608" "CAP 1608 (0603_INCH)" 83.7,50.3 r180 top
C465 "10uF/25V/1608" "CAP 1608 (0603_INCH)" 83.7,48.6 r180 top
C466 "100nF/25V/0603" "CAP 0603 (0201_INCH)" 73,49.9 r0 bottom
C467 "100nF/25V/0603" "CAP 0603 (0201_INCH)" 73,49.1 r0 bottom
C468 "100nF/25V/0603" "CAP 0603 (0201_INCH)" 61.1,44.5 r90 bottom
C469 "100nF/25V/0603" "CAP 0603 (0201_INCH)" 61.5,45.7 r0 bottom
C470 "100nF/25V/0603" "CAP 0603 (0201_INCH)" 61.49,43.3 r0 bottom
C471 "100nF/25V/0603" "CAP 0603 (0201_INCH)" 60.3,44.5 r90 bottom
C472 "100nF/25V/0603" "CAP 0603 (0201_INCH)" 62.3,42.5 r180 bottom
C473 "100nF/25V/0603" "CAP 0603 (0201_INCH)" 54.3,41.7 r0 bottom
C500 "4.7uF/10V/1005" "CAP 1005 (0402_INCH)" 80.5,82 r180 bottom
C501 "100nF/25V/0603" "CAP 0603 (0201_INCH)" 55.81,55.2 r180 bottom
C502 "100nF/25V/0603" "CAP 0603 (0201_INCH)" 57.51,35.1 r0 bottom
C503 "100nF/25V/0603" "CAP 0603 (0201_INCH)" 57.51,35.9 r0 bottom
C504 "1nF/50V/0603" "CAP 0603 (0201_INCH)" 57.51,36.7 r0 bottom
C505 "100nF/25V/0603" "CAP 0603 (0201_INCH)" 59,35.1 r90 bottom
C600 "47nF/16V/0603" "CAP 0603 (0201_INCH)" 211.7,39.3 r90 top
C601 "47nF/16V/0603" "CAP 0603 (0201_INCH)" 214.4,39.29 r90 top
C602 "1nF/50V/1005" "CAP 1005 (0402_INCH)" 217.4,39.2 r90 top
C603 "47nF/16V/0603" "CAP 0603 (0201_INCH)" 80.7,48.8 r270 bottom
C604 "47nF/16V/0603" "CAP 0603 (0201_INCH)" 80.3,50 r180 bottom
C605 "47nF/16V/0603" "CAP 0603 (0201_INCH)" 80.3,46.8 r0 bottom
C606 "47nF/16V/0603" "CAP 0603 (0201_INCH)" 80.3,47.6 r0 bottom
C607 "47nF/16V/0603" "CAP 0603 (0201_INCH)" 79.9,43.2 r270 bottom
C608 "47nF/16V/0603" "CAP 0603 (0201_INCH)" 80.7,44.8 r270 bottom
C609 "47nF/16V/0603" "CAP 0603 (0201_INCH)" 79.5,45.2 r180 bottom
C610 "47nF/16V/0603" "CAP 0603 (0201_INCH)" 74.3,38.4 r90 bottom
C611 "47nF/16V/0603" "CAP 0603 (0201_INCH)" 74.3,40 r90 bottom
C612 "47nF/16V/0603" "CAP 0603 (0201_INCH)" 80.7,39.2 r270 bottom
C613 "47nF/16V/0603" "CAP 0603 (0201_INCH)" 81.7,40.79 r270 bottom
C614 "47nF/16V/0603" "CAP 0603 (0201_INCH)" 83,46.5 r180 bottom
C615 "47nF/16V/0603" "CAP 0603 (0201_INCH)" 75.5,49.2 r180 bottom
C616 "47nF/16V/0603" "CAP 0603 (0201_INCH)" 74.3,48 r90 bottom
C617 "47nF/16V/0603" "CAP 0603 (0201_INCH)" 75.1,47.2 r90 bottom
C618 "47nF/16V/0603" "CAP 0603 (0201_INCH)" 73.9,46 r0 bottom
C619 "47nF/16V/0603" "CAP 0603 (0201_INCH)" 74.7,44.4 r0 bottom
C620 "47nF/16V/0603" "CAP 0603 (0201_INCH)" 75.1,43.2 r270 bottom
C621 "47nF/16V/0603" "CAP 0603 (0201_INCH)" 83,47.3 r180 bottom
C622 "47nF/16V/0603" "CAP 0603 (0201_INCH)" 83,46.5 r180 top
C623 "47nF/16V/0603" "CAP 0603 (0201_INCH)" 83,47.3 r180 top
C624 "47nF/16V/0603" "CAP 0603 (0201_INCH)" 74.3,49.6 r90 bottom
C625 "100nF/25V/0603" "CAP 0603 (0201_INCH)" 62.3,44.1 r0 bottom
C700 "100nF/25V/0603" "CAP 0603 (0201_INCH)" 99.3,45.7 r270 top
C701 "10uF/25V/1608" "CAP 1608 (0603_INCH)" 102,65.3 r180 top
C702 "100nF/16V/1005" "CAP 1005 (0402_INCH)" 102.235,63.6 r180 top
C703 "100nF/25V/0603" "CAP 0603 (0201_INCH)" 198.9,35.29 r90 top
C704 "10uF/10V/1608" "CAP 1608 (0603_INCH)" 83.6,63.825 r270 bottom
C705 "100nF/16V/1005" "CAP 1005 (0402_INCH)" 78.6,63.9 r90 bottom
C706 "100nF/16V/1005" "CAP 1005 (0402_INCH)" 82.2,63.4 r270 bottom
C707 "100nF/16V/1005" "CAP 1005 (0402_INCH)" 80.3,65.1 r180 bottom
C708 "100nF/16V/1005" "CAP 1005 (0402_INCH)" 81,63.4 r270 bottom
C709 "2.2uF/16V/1608" "CAP 1608 (0603_INCH)" 74,64.9 r0 bottom
C710 "10uF/10V/1608" "CAP 1608 (0603_INCH)" 78.175,58.3 r180 bottom
C711 "100nF/16V/1005" "CAP 1005 (0402_INCH)" 80.3,66.3 r180 bottom
C712 "100nF/16V/1005" "CAP 1005 (0402_INCH)" 78.64,59.7 r180 bottom
C713 "100nF/16V/1005" "CAP 1005 (0402_INCH)" 76.4,59.7 r0 bottom
C714 "100nF/16V/1005" "CAP 1005 (0402_INCH)" 76.4,60.9 r0 bottom
C800 "10uF/25V/1608" "CAP 1608 (0603_INCH)" 24.5,41.5 r180 top
C801 "100nF/16V/1005" "CAP 1005 (0402_INCH)" 27.8,39.86 r270 bottom
C802 "100nF/16V/1005" "CAP 1005 (0402_INCH)" 32.96,42.9 r0 bottom
C803 "1uF/50V/1608" "CAP 1608 (0603_INCH)" 30.8,39.5 r0 bottom
C804 "470pF/50V/1608" "CAP 1608 (0603_INCH)" 30.8,37.8 r0 bottom
C805 "18pF/50V/1608" "CAP 1608 (0603_INCH)" 17.9,35.4 r0 top
C806 "18pF/50V/1608" "CAP 1608 (0603_INCH)" 17.2,38 r90 top
C807 "4.7uF/16V/1608" "CAP 1608 (0603_INCH)" 25.9,27.925 r90 bottom
C808 "100nF/16V/1005" "CAP 1005 (0402_INCH)" 23.7,27.86 r90 bottom
C809 "10pF/50V/1608" "CAP 1608 (0603_INCH)" 33.675,49.7 r180 bottom
C810 "10pF/50V/1608" "CAP 1608 (0603_INCH)" 33.675,51.4 r180 bottom
C811 "10pF/50V/1608" "CAP 1608 (0603_INCH)" 27.5,45.35 r0 bottom
C812 "10pF/50V/1608" "CAP 1608 (0603_INCH)" 27.5,47 r0 bottom
C813 "10nF/50V/1608" "CAP 1608 (0603_INCH)" 11.3,54.1 r180 bottom
C814 "10nF/50V/1608" "CAP 1608 (0603_INCH)" 11.3,52.4 r180 bottom
C900 "100nF/25V/0603" "CAP 0603 (0201_INCH)" 198.1,23.7 r90 top
C901 "4.7uF/10V/1005" "CAP 1005 (0402_INCH)" 112.36,76.1 r0 bottom
C902 "100nF/25V/0603" "CAP 0603 (0201_INCH)" 100.59,74 r0 bottom
C903 "4.7uF/10V/1005" "CAP 1005 (0402_INCH)" 99.56,74.8 r180 top
C904 "1uF/25V/1005" "CAP 1005 (0402_INCH)" 103.9,73.66 r270 bottom
C905 "100nF/25V/0603" "CAP 0603 (0201_INCH)" 102.8,74.01 r270 bottom
C1000 "1nF/2kV/3216" "CAP 3216 (1206_INCH) - H1.8MM" 5.25,64.5 r0 bottom
CN300 "DC_Jack" CON_DC-JACK 14.85,66.9 r90 top locked
CN500 "UX60SC-MB-5ST(80)" "CON_USB2.0-Mini-B (UX60SC-MB-5ST(80))" 89,79.25 r180 top locked
CN700 "TF-01A" CON_MICRO-SD_Socket_TF-01A 110.5,62.5 r270 bottom locked
CN800 "HR911105A" CON_RJ45 11.22,55.005 r90 top locked
CN900 "MC-311S" "CON USB-Type-C (16P)" 104.5,80 r180 top locked
CN1000 "10144517-101802LF" CON_BergStak-Lite(0.8mm)_MALE-100P(10144517-101802LF)_HandSolder 65,8 r180 bottom locked
CN1001 "10144517-101802LF" CON_BergStak-Lite(0.8mm)_MALE-100P(10144517-101802LF)_HandSolder 55,77 r180 bottom locked
CN1002 "PH_4P" "CON PIN_HEADER-4PIN(2.54MM)" 197.8,2.32 r90 top
D300 "B5819W" DIO_SOD-123 9.6,33.9 r180 bottom
D301 "B5819W" DIO_SOD-123 9.6,30.7 r180 bottom
FB400 "BLM21PG121SN1D" "FB 2012 (0805_inch)" 56.525,33.5 r0 bottom
FB401 "BLM21PG121SN1D" "FB 2012 (0805_inch)" 48.1,54.6 r0 top
FB402 "BLM21PG121SN1D" "FB 2012 (0805_inch)" 56.525,30 r0 bottom
FB800 "BLM21PG121SN1D" "FB 2012 (0805_inch)" 21.5,31.2 r90 top
H1000 "PTH-3MM" "HOLE PTH-3MM" 5,80 r0 top locked
H1001 "PTH-3MM" "HOLE PTH-3MM" 5,5 r0 top locked
H1002 "PTH-3MM" "HOLE PTH-3MM" 115,5 r0 top locked
H1003 "PTH-3MM" "HOLE PTH-3MM" 115,80 r0 top locked
L300 "LQM2HPN2R2MG0L" IND_LQM2HPN2R2MG0L 28,64.69 r90 top
L301 "LQM2HPN2R2MG0L" IND_LQM2HPN2R2MG0L 28,59.6 r270 top
L302 "LQM2HPN2R2MG0L" IND_LQM2HPN2R2MG0L 31.75,56.85 r180 top
LED300 "GREEN/2012" "LED MHT170RGBCT (GREEN)" 10.75,82 r0 top
LED301 "GREEN/2012" "LED MHT170RGBCT (GREEN)" 20.25,82 r0 top
LED302 "GREEN/2012" "LED MHT170RGBCT (GREEN)" 20.25,78.75 r0 top
LED303 "GREEN/2012" "LED MHT170RGBCT (GREEN)" 10.75,78.75 r0 top
LED500 "GREEN/2012" "LED MHT170RGBCT (GREEN)" 80.45,82 r180 top
LED501 "BLUE/2012" "LED MHT170RGBCT (BLUE)" 113.1,51.35 r0 top
LED502 "BLUE/2012" "LED MHT170RGBCT (BLUE)" 113.1,48.85 r0 top
LED503 "BLUE/2012" "LED MHT170RGBCT (BLUE)" 113.1,46.35 r0 top
LED504 "BLUE/2012" "LED MHT170RGBCT (BLUE)" 113.1,43.85 r0 top
LED800 "RGB/2012" "LED MHT170RGBCT" 198.5,29 r270 top
LED900 "GREEN/2012" "LED MHT170RGBCT (GREEN)" 112.9,74.4 r0 top
LED901 "BLUE/2012" "LED MHT170RGBCT (BLUE)" 112.9,72.1 r0 top
LED902 "BLUE/2012" "LED MHT170RGBCT (BLUE)" 112.9,69.8 r0 top
Q500 "2N7002" "SOT 23-3 (DIODES INCORPORATED)" 114,51 r90 bottom
Q501 "2N7002" "SOT 23-3 (DIODES INCORPORATED)" 114,45.5 r90 bottom
Q502 "2N7002" "SOT 23-3 (DIODES INCORPORATED)" 114,40 r90 bottom
Q503 "2N7002" "SOT 23-3 (DIODES INCORPORATED)" 114,34.5 r90 bottom
Q800 "2N7002" "SOT 23-3 (DIODES INCORPORATED)" 105.25,51 r90 bottom
Q801 "2N7002" "SOT 23-3 (DIODES INCORPORATED)" 105.25,45.5 r90 bottom
Q802 "2N7002" "SOT 23-3 (DIODES INCORPORATED)" 105.25,40 r90 bottom
R300 "0R/2012" "RES 2012 (0805_inch)" 18,68.625 r90 top value=0R
R301 "100K/1608" "RES 1608 (0603_inch)" 13.8,30.7 r0 bottom value=100K
R302 "10K/1608/NC" "RES 1608 (0603_inch)/NC" 6.25,43.5 r0 bottom value=10K
R303 "10K/1608/NC" "RES 1608 (0603_inch)/NC" 6.25,41.75 r0 bottom value=10K
R304 "100K/1608" "RES 1608 (0603_inch)" 6,33.2 r270 bottom value=100K
R305 "100K/1608" "RES 1608 (0603_inch)" 13.8,33.9 r0 bottom value=100K
R306 "680R/2012" "RES 2012 (0805_inch)" 10.538,82 r0 bottom value=680R
R307 "4.7K/1608" "RES 1608 (0603_inch)" 34.75,70.2 r0 top value=4.7K
R308 "0R/1005" "RES 1005 (0402_inch)" 34,68.15 r90 top value=0R
R309 "0R/2012" "RES 2012 (0805_inch)" 17.25,65.25 r0 bottom value=0R
R310 "0R/2012" "RES 2012 (0805_inch)" 25.5,64.69 r270 top value=0R
R311 "0R/2012" "RES 2012 (0805_inch)" 25.5,59.6 r90 top value=0R
R312 "0R/2012" "RES 2012 (0805_inch)" 31.535,54.35 r0 top value=0R
R313 "0R/2012" "RES 2012 (0805_inch)" 38.25,69.1 r0 top value=0R
R314 "0R/2012" "RES 2012 (0805_inch)" 38.25,71.35 r0 bottom value=0R
R315 "0R/2012" "RES 2012 (0805_inch)" 38.25,71.35 r0 top value=0R
R316 "0R/2012" "RES 2012 (0805_inch)" 38.75,66.6 r0 top value=0R
R317 "0R/2012" "RES 2012 (0805_inch)" 40.5,60.35 r0 top value=0R
R318 "510R/1608" "RES 1608 (0603_inch)" 20.038,82 r0 bottom value=510R
R319 "0R/2012" "RES 2012 (0805_inch)" 40.5,62.6 r0 top value=0R
R320 "1.5K/2012" "RES 2012 (0805_inch)" 27.5,54.35 r180 top value=1.5K
R321 "1.5K/2012" "RES 2012 (0805_inch)" 27.5,56.6 r180 top value=1.5K
R322 "0R/1005" "RES 1005 (0402_inch)" 16.7,27.3 r0 top value=0R
R323 "0R/1005" "RES 1005 (0402_inch)" 16.7,26 r0 top value=0R
R324 "0R/1005" "RES 1005 (0402_inch)" 16.7,23.5 r0 top value=0R
R325 "0R/1005" "RES 1005 (0402_inch)" 16.7,22.1 r0 top value=0R
R326 "200K/1608" "RES 1608 (0603_inch)" 23.7,13.5 r90 bottom value=200K
R327 "4.7K/1005" "RES 1005 (0402_inch)" 28.3,65.7 r90 bottom value=4.7K
R328 "4.7K/1005" "RES 1005 (0402_inch)" 38.26,61.5 r180 bottom value=4.7K
R329 "0R/1005" "RES 1005 (0402_inch)" 16.7,20.7 r0 top value=0R
R330 "0R/1005" "RES 1005 (0402_inch)" 16.7,19.3 r0 top value=0R
R331 "510R/1608" "RES 1608 (0603_inch)" 20.038,78.75 r0 bottom value=510R
R332 "0R/1005" "RES 1005 (0402_inch)" 16.7,17.9 r0 top value=0R
R333 "330K/1608" "RES 1608 (0603_inch)" 26.3,13.5 r270 bottom value=330K
R334 "510R/1608" "RES 1608 (0603_inch)" 10.538,78.75 r0 bottom value=510R
R335 "0R/1608" "RES 1608 (0603_inch)" 15.8,11.1 r180 bottom value=0R
R336 "0R/2012" "RES 2012 (0805_inch)" 12.3,7.3 r0 bottom value=0R
R337 "0R/2012/NC" "RES 2012 (0805_INCH)/NC" 12.3,5.2 r0 bottom value=0R
R400 "0R/1005" "RES 1005 (0402_inch)" 55.8,53.9 r180 bottom value=0R
R401 "0R/1005" "RES 1005 (0402_inch)" 60.7,32.9 r0 top value=0R
R500 "0R/2012" "RES 2012 (0805_inch)" 200.4,43.7 r90 top value=0R
R514 "100K/1608" "RES 1608 (0603_inch)" 18.55,6.2 r180 bottom value=100K
R517 "100R/1608" "RES 1608 (0603_inch)" 18.55,7.9 r0 bottom value=100R
R518 "4.7K/1005" "RES 1005 (0402_inch)" 209.3,43.7 r90 top value=4.7K
R519 "4.7K/1005" "RES 1005 (0402_inch)" 211.7,43.56 r90 top value=4.7K
R520 "1K/1608" "RES 1608 (0603_inch)" 80.5,80.5 r0 bottom value=1K
R521 "0R/0603" "RES 0603 (0201_inch)" 51.9,48.1 r180 bottom value=0R
R535 "100K/1608/NC" "RES 1608 (0603_inch)/NC" 18.55,4.5 r0 bottom value=100K
R538 "10K/1005" "RES 1005 (0402_inch)" 62.6,36.5 r270 bottom value=10K
R539 "470R/1608" "RES 1608 (0603_inch)" 111.5,50.5 r90 bottom value=470R
R541 "0R/0603" "RES 0603 (0201_inch)" 58.7,38.875 r90 bottom value=0R
R542 "12K/1608" "RES 1608 (0603_inch)" 114,48.5 r180 bottom value=12K
R544 "22R/1608" "RES 1608 (0603_inch)" 116.5,50.5 r270 bottom value=22R
R545 "0R/0603" "RES 0603 (0201_inch)" 59.1,36.7 r0 bottom value=0R
R546 "470R/1608" "RES 1608 (0603_inch)" 111.5,45 r90 bottom value=470R
R547 "12K/1608" "RES 1608 (0603_inch)" 114,43 r180 bottom value=12K
R548 "22R/1608" "RES 1608 (0603_inch)" 116.5,45 r270 bottom value=22R
R549 "470R/1608" "RES 1608 (0603_inch)" 111.5,39.5 r90 bottom value=470R
R551 "12K/1608" "RES 1608 (0603_inch)" 114,37.5 r180 bottom value=12K
R552 "22R/1608" "RES 1608 (0603_inch)" 116.5,39.5 r270 bottom value=22R
R554 "470R/1608" "RES 1608 (0603_inch)" 111.5,34 r90 bottom value=470R
R555 "12K/1608" "RES 1608 (0603_inch)" 114,32 r180 bottom value=12K
R556 "22R/1608" "RES 1608 (0603_inch)" 116.5,34 r270 bottom value=22R
R600 "1.5K/1005" "RES 1005 (0402_inch)" 198.9,39.16 r90 top value=1.5K
R601 "10K/1005" "RES 1005 (0402_inch)" 201.2,39.16 r90 top value=10K
R602 "10K/1005" "RES 1005 (0402_inch)" 203.4,39.16 r90 top value=10K
R603 "10K/1005" "RES 1005 (0402_inch)" 205.7,39.16 r90 top value=10K
R604 "240R/1608" "RES 1608 (0603_inch)" 208.5,39.05 r90 top value=240R
R605 "49.9R/1005" "RES 1005 (0402_inch)" 63.3,38.66 r270 bottom value=49.9R
R700 "4.7K/1608/NC" "RES 1608 (0603_inch)/NC" 95.05,44.5 r180 bottom value=4.7K
R701 "4.7K/1608/NC" "RES 1608 (0603_inch)/NC" 95.05,42.8 r180 bottom value=4.7K
R702 "4.7K/1005" "RES 1005 (0402_inch)" 95.06,46 r180 bottom value=4.7K
R703 "10K/1005" "RES 1005 (0402_inch)" 102.97,69 r180 bottom value=10K
R704 "10K/1005" "RES 1005 (0402_inch)" 107.5,64.6 r0 top value=10K
R705 "10K/1005" "RES 1005 (0402_inch)" 107.5,62.9 r0 top value=10K
R706 "10K/1005" "RES 1005 (0402_inch)" 107.5,66.3 r0 top value=10K
R707 "10K/1005" "RES 1005 (0402_inch)" 107.5,67.899 r0 top value=10K
R708 "10K/1005" "RES 1005 (0402_inch)" 107.5,59.6 r0 top value=10K
R709 "10K/1005" "RES 1005 (0402_inch)" 107.5,61.2 r0 top value=10K
R710 "22R/1005" "RES 1005 (0402_inch)" 44.7,34.8 r270 top value=22R
R711 "0R/1608" "RES 1608 (0603_inch)" 102.7,70.6 r180 bottom value=0R
R712 "22R/1005" "RES 1005 (0402_inch)" 43.4,34.8 r270 top value=22R
R713 "22R/1005" "RES 1005 (0402_inch)" 46,34.8 r270 top value=22R
R714 "22R/1005" "RES 1005 (0402_inch)" 47.3,34.8 r270 top value=22R
R715 "22R/1005" "RES 1005 (0402_inch)" 48.6,34.8 r270 top value=22R
R716 "22R/1005" "RES 1005 (0402_inch)" 49.9,34.8 r270 top value=22R
R717 "0R/2012" "RES 2012 (0805_inch)" 201.4,34.625 r90 top value=0R
R718 "0R/1608" "RES 1608 (0603_inch)" 82.7,60 r0 bottom value=0R
R719 "22R/1005" "RES 1005 (0402_inch)" 56.1,59.5 r270 top value=22R
R720 "10K/1005" "RES 1005 (0402_inch)" 73.2,59.8 r270 bottom value=10K
R721 "10K/1005" "RES 1005 (0402_inch)" 80.5,59.24 r270 bottom value=10K
R722 "10K/1005" "RES 1005 (0402_inch)" 74.4,59.8 r270 bottom value=10K
R723 "0R/0603" "RES 0603 (0201_inch)" 203.6,34.85 r90 top value=0R
R724 "0R/1005" "RES 1005 (0402_inch)" 81.7,61.5 r0 bottom value=0R
R725 "22R/1005" "RES 1005 (0402_inch)" 54.8,59.5 r270 top value=22R
R726 "10K/1005" "RES 1005 (0402_inch)" 75.2,70.4 r90 bottom value=10K
R727 "10K/1005" "RES 1005 (0402_inch)" 76.5,70.4 r90 bottom value=10K
R728 "10K/1005" "RES 1005 (0402_inch)" 77.8,70.4 r90 bottom value=10K
R729 "10K/1005" "RES 1005 (0402_inch)" 74.4,66.4 r180 bottom value=10K
R730 "10K/1005" "RES 1005 (0402_inch)" 74.4,67.7 r180 bottom value=10K
R731 "10K/1005" "RES 1005 (0402_inch)" 80.3,70.2 r0 bottom value=10K
R732 "10K/1005" "RES 1005 (0402_inch)" 80.3,68.9 r0 bottom value=10K
R733 "10K/1005" "RES 1005 (0402_inch)" 80.3,67.6 r0 bottom value=10K
R734 "22R/1005" "RES 1005 (0402_inch)" 66.5,59.5 r270 top value=22R
R735 "22R/1005" "RES 1005 (0402_inch)" 65.2,59.5 r270 top value=22R
R736 "22R/1005" "RES 1005 (0402_inch)" 63.9,59.5 r270 top value=22R
R737 "22R/1005" "RES 1005 (0402_inch)" 62.6,59.5 r270 top value=22R
R738 "22R/1005" "RES 1005 (0402_inch)" 61.3,59.5 r270 top value=22R
R739 "22R/1005" "RES 1005 (0402_inch)" 60,59.5 r270 top value=22R
R740 "22R/1005" "RES 1005 (0402_inch)" 58.7,59.5 r270 top value=22R
R741 "22R/1005" "RES 1005 (0402_inch)" 57.4,59.5 r270 top value=22R
R742 "0R/2012" "RES 2012 (0805_inch)" 73.7,63 r180 bottom value=0R
R800 "100R/1005" "RES 1005 (0402_inch)" 39.9,45 r180 top value=100R
R801 "22R/1005" "RES 1005 (0402_inch)" 39.9,42.4 r180 top value=22R
R802 "22R/1005" "RES 1005 (0402_inch)" 39.9,47.6 r180 top value=22R
R803 "22R/1005" "RES 1005 (0402_inch)" 39.9,46.3 r180 top value=22R
R804 "22R/1005" "RES 1005 (0402_inch)" 39.9,43.7 r180 top value=22R
R805 "22R/1005" "RES 1005 (0402_inch)" 39.9,41.1 r180 top value=22R
R806 "100R/1005" "RES 1005 (0402_inch)" 39.9,33.3 r180 bottom value=100R
R807 "100R/1005" "RES 1005 (0402_inch)" 39.9,34.6 r180 bottom value=100R
R808 "100R/1005" "RES 1005 (0402_inch)" 39.9,30.7 r180 bottom value=100R
R809 "100R/1005" "RES 1005 (0402_inch)" 39.9,32 r180 bottom value=100R
R810 "100R/1005" "RES 1005 (0402_inch)" 39.9,35.9 r180 bottom value=100R
R811 "100R/1005" "RES 1005 (0402_inch)" 39.9,29.4 r180 bottom value=100R
R812 "100R/1005" "RES 1005 (0402_inch)" 39.9,28.1 r180 bottom value=100R
R813 "0R/1608/NC" "RES 1608 (0603_inch)/NC" 24.5,33.6 r0 bottom value=0R
R814 "100R/1005" "RES 1005 (0402_inch)" 36,33.8 r180 top value=100R
R815 "0R/1608/NC" "RES 1608 (0603_inch)/NC" 24.5,35.3 r0 bottom value=0R
R816 "100R/1005" "RES 1005 (0402_inch)" 36,32.5 r180 top value=100R
R817 "0R/1005" "RES 1005 (0402_inch)" 36,35.1 r180 top value=0R
R818 "0R/1005" "RES 1005 (0402_inch)" 36,36.4 r180 top value=0R
R819 "10K/1608" "RES 1608 (0603_inch)" 202.7,29 r90 top value=10K
R820 "0R/1608" "RES 1608 (0603_inch)" 24.5,37.6 r0 top value=0R
R821 "0R/1608" "RES 1608 (0603_inch)" 24.5,39.6 r0 top value=0R
R822 "12K/1608" "RES 1608 (0603_inch)" 205.5,28.95 r90 top value=12K
R823 "100R/1608" "RES 1608 (0603_inch)" 207.8,28.85 r90 top value=100R
R824 "10K/1608" "RES 1608 (0603_inch)" 36.3,37.4 r180 bottom value=10K
R825 "1.5K/1608" "RES 1608 (0603_inch)" 30.7,26.1 r270 top value=1.5K
R826 "1.5K/1608" "RES 1608 (0603_inch)" 28.9,26.1 r270 top value=1.5K
R827 "1.5K/1608" "RES 1608 (0603_inch)" 37.75,26.1 r270 top value=1.5K
R828 "1.5K/1608" "RES 1608 (0603_inch)" 32.5,26.1 r270 top value=1.5K
R829 "10K/1608" "RES 1608 (0603_inch)" 34.25,26.1 r270 top value=10K
R830 "10K/1608" "RES 1608 (0603_inch)" 36,26.1 r270 top value=10K
R831 "10K/1608" "RES 1608 (0603_inch)" 39.9,37.4 r0 bottom value=10K
R832 "10K/1608" "RES 1608 (0603_inch)" 39.46,26.1 r270 top value=10K
R833 "470R/1608" "RES 1608 (0603_inch)" 102.75,39.5 r270 bottom value=470R
R834 "10K/1608" "RES 1608 (0603_inch)" 24.812,30.9 r180 top value=10K
R835 "470R/1608" "RES 1608 (0603_inch)" 102.75,45 r270 bottom value=470R
R836 "0R/2012" "RES 2012 (0805_inch)" 14.1,53.2 r270 bottom value=0R
R837 "10K/1608" "RES 1608 (0603_inch)" 22,27.2 r90 top value=10K
R838 "470R/1608" "RES 1608 (0603_inch)" 102.75,50.5 r270 bottom value=470R
R839 "49.9R/1005" "RES 1005 (0402_inch)" 33.44,49.7 r0 top value=49.9R
R840 "49.9R/1005" "RES 1005 (0402_inch)" 33.44,51.4 r0 top value=49.9R
R841 "49.9R/1005" "RES 1005 (0402_inch)" 27.735,45.35 r180 top value=49.9R
R842 "49.9R/1005" "RES 1005 (0402_inch)" 27.735,47 r180 top value=49.9R
R843 "0R/2012" "RES 2012 (0805_inch)" 23,55.6 r90 bottom value=0R
R844 "0R/2012" "RES 2012 (0805_inch)" 25.2,55.6 r90 bottom value=0R
R845 "0R/2012" "RES 2012 (0805_inch)" 27.5,48.9 r180 bottom value=0R
R846 "0R/2012" "RES 2012 (0805_inch)" 27.5,51 r180 bottom value=0R
R847 "12K/1608" "RES 1608 (0603_inch)" 105.25,48.5 r180 bottom value=12K
R848 "22R/1608" "RES 1608 (0603_inch)" 107.75,50.5 r270 bottom value=22R
R849 "470R/1608" "RES 1608 (0603_inch)" 5.6,56.8 r0 bottom value=470R
R850 "470R/1608" "RES 1608 (0603_inch)" 5.6,53.2 r0 bottom value=470R
R851 "12K/1608" "RES 1608 (0603_inch)" 105.25,43 r180 bottom value=12K
R852 "22R/1608" "RES 1608 (0603_inch)" 107.75,45 r270 bottom value=22R
R853 "12K/1608" "RES 1608 (0603_inch)" 105.25,37.5 r180 bottom value=12K
R854 "22R/1608" "RES 1608 (0603_inch)" 107.75,39.5 r270 bottom value=22R
R900 "0R/2012" "RES 2012 (0805_inch)" 202.4,23.6 r90 top value=0R
R901 "0R/2012/NC" "RES 2012 (0805_INCH)/NC" 205,23.6 r90 top value=0R
R902 "0R/2012/NC" "RES 2012 (0805_INCH)/NC" 208.2,23.1 r90 top value=0R
R903 "0R/2012" "RES 2012 (0805_inch)" 210.8,23.175 r90 top value=0R
R904 "100K/1005" "RES 1005 (0402_inch)" 213.4,23.46 r90 top value=100K
R905 "5.1K/1005" "RES 1005 (0402_inch)" 101.6,79.9 r0 bottom value=5.1K
R906 "5.1K/1005" "RES 1005 (0402_inch)" 107,79.9 r180 bottom value=5.1K
R907 "1K/1608" "RES 1608 (0603_inch)" 112.688,74.4 r180 bottom value=1K
R908 "10K/1608" "RES 1608 (0603_inch)" 6.3,26 r0 bottom value=10K
R909 "4.7K/1005" "RES 1005 (0402_inch)" 99.56,73 r0 top value=4.7K
R910 "0R/1005" "RES 1005 (0402_inch)" 6.1,24.6 r0 bottom value=0R
R911 "680R/1608" "RES 1608 (0603_inch)" 112.688,72.1 r0 bottom value=680R
R912 "680R/1608" "RES 1608 (0603_inch)" 109,72.1 r0 bottom value=680R
R913 "0R/2012" "RES 2012 (0805_inch)" 100.1,60.5 r180 top value=0R
R914 "0R/2012" "RES 2012 (0805_inch)" 100.1,57.5 r180 top value=0R
R915 "0R/1608" "RES 1608 (0603_inch)" 52.8,31.3 r0 bottom value=0R
R1003 "0R/1005" "RES 1005 (0402_inch)" 47,2.25 r270 bottom value=0R
R1009 "0R/1005" "RES 1005 (0402_inch)" 51.8,2.25 r270 bottom value=0R
R1010 "0R/1005" "RES 1005 (0402_inch)" 53.4,14.25 r270 bottom value=0R
R1011 "0R/1005" "RES 1005 (0402_inch)" 53.4,2.25 r270 bottom value=0R
R1012 "0R/1005" "RES 1005 (0402_inch)" 55,14.25 r270 bottom value=0R
R1013 "0R/1005" "RES 1005 (0402_inch)" 55,2.25 r270 bottom value=0R
R1014 "0R/1005" "RES 1005 (0402_inch)" 56.6,14.25 r270 bottom value=0R
R1015 "0R/1005" "RES 1005 (0402_inch)" 69,71.24 r270 bottom value=0R
R1016 "0R/1005" "RES 1005 (0402_inch)" 58.2,14.25 r270 bottom value=0R
R1017 "0R/1005" "RES 1005 (0402_inch)" 70.6,71.24 r270 bottom value=0R
R1018 "0R/1005" "RES 1005 (0402_inch)" 59.8,14.25 r270 bottom value=0R
R1019 "0R/1005" "RES 1005 (0402_inch)" 65.8,71.24 r270 bottom value=0R
R1020 "0R/1005" "RES 1005 (0402_inch)" 61.4,14.25 r270 bottom value=0R
R1021 "0R/1005" "RES 1005 (0402_inch)" 67.4,71.24 r270 bottom value=0R
R1022 "0R/1005" "RES 1005 (0402_inch)" 63,14.25 r270 bottom value=0R
R1023 "0R/1005" "RES 1005 (0402_inch)" 64.6,14.25 r270 bottom value=0R
R1027 "0R/1005" "RES 1005 (0402_inch)" 53,82.75 r270 bottom value=0R
R1028 "0R/1005" "RES 1005 (0402_inch)" 53,71.25 r270 bottom value=0R
R1029 "0R/1005" "RES 1005 (0402_inch)" 71,14.25 r270 bottom value=0R
R1030 "0R/1005" "RES 1005 (0402_inch)" 54.6,82.75 r270 bottom value=0R
R1031 "0R/1005" "RES 1005 (0402_inch)" 54.6,71.25 r270 bottom value=0R
R1032 "0R/1005" "RES 1005 (0402_inch)" 72.6,14.25 r270 bottom value=0R
R1033 "0R/1005" "RES 1005 (0402_inch)" 56.2,82.75 r270 bottom value=0R
R1034 "0R/1005" "RES 1005 (0402_inch)" 56.2,71.25 r270 bottom value=0R
R1035 "0R/1005" "RES 1005 (0402_inch)" 74.2,14.25 r270 bottom value=0R
R1036 "0R/1005" "RES 1005 (0402_inch)" 57.8,82.75 r270 bottom value=0R
R1037 "0R/1005" "RES 1005 (0402_inch)" 57.8,71.25 r270 bottom value=0R
R1038 "0R/1005" "RES 1005 (0402_inch)" 75.8,14.25 r270 bottom value=0R
R1039 "0R/1005" "RES 1005 (0402_inch)" 59.4,82.75 r270 bottom value=0R
R1041 "0R/1005" "RES 1005 (0402_inch)" 77.4,14.25 r270 bottom value=0R
R1042 "0R/1005" "RES 1005 (0402_inch)" 61,82.75 r270 bottom value=0R
R1044 "0R/1005" "RES 1005 (0402_inch)" 79,14.25 r270 bottom value=0R
R1045 "0R/1005" "RES 1005 (0402_inch)" 62.6,82.75 r270 bottom value=0R
R1046 "0R/1005" "RES 1005 (0402_inch)" 62.6,71.25 r270 bottom value=0R
R1047 "0R/1005" "RES 1005 (0402_inch)" 80.6,14.25 r270 bottom value=0R
R1048 "0R/1005" "RES 1005 (0402_inch)" 64.2,82.75 r270 bottom value=0R
R1049 "0R/1005" "RES 1005 (0402_inch)" 64.2,71.25 r270 bottom value=0R
R1050 "0R/1005" "RES 1005 (0402_inch)" 82.2,14.25 r270 bottom value=0R
R1052 "0R/1005" "RES 1005 (0402_inch)" 83.8,14.25 r270 bottom value=0R
R1056 "1M/2012" "RES 2012 (0805_inch)" 5.925,67 r0 bottom value=1M
SW300 "K2-1102SP-C4SC-04" "SW K2-1102SP-C4SC-04" 8,42.75 r0 top locked
SW301 "K2-1102SP-C4SC-04" "SW K2-1102SP-C4SC-04" 8,33.25 r0 top locked
SW500 "K2-1102SP-C4SC-04" "SW K2-1102SP-C4SC-04" 8,14.25 r0 top locked
SW900 "K2-1102SP-C4SC-04" "SW K2-1102SP-C4SC-04" 8,23.75 r0 top locked
U300 "TPS65217CRSLR" IC_VQFN-48(6x6) 33.675,63.3 r270 top
U301 "AMS1117-3.3" "SOT 223-3 (DIODES INCORPORATED)" 8.8,15.8 r90 bottom
U302 "MIC5209YM-TR" "IC_SOIC-8 (4.90x3.90mm)" 19,14.8 r180 bottom
U400 "AM3358BZCZ100" IC_SOC_AM3358BZCZ100 58.3,44.5 r180 top locked
U501 "TPD4S012DRYR" IC_SON-6 89.7,79.7 r90 bottom
U601 "D2516ECMDXGJD-U" "IC_MEM_DDR3L_MT41K256M16TW-107 IT:P" 77.5,44 r0 top locked
U701 "AT24C16" "TSSOP-8_PW (TI)" 94.8,45.3 r0 top
U702 "SN74LVC1G06DCKR" IC_SC-70-5 82.6,57.4 r90 bottom
U703 "MTFC32GAZAQHD-WT" IC_VFBGA-153 79.05,63.85 r0 top locked
U800 "LAN8710A-EZC-TR" "IC_QFN-32 (5x5)" 31.55,38.565 r0 top
U802 "SN74AHC1G09DBVR" "SOT-23-5 (TI DBV PACKAGE)" 25,27.9 r90 top
U900 "SN74LVC2G241DCUR" IC_VSSOP-8 217.5,23.3 r0 top
U902 "SN74LVC1G07DCKR" IC_SC-70-5 52.9,34.1 r270 bottom
U903 "CP2102-GMR" "QFN-28 (5x5mm)" 104.1,72 r270 top
X500 "SX2M24.000M20F30TNN" "OSC SMD_2.5x2.0 (SCTF)" 55.45,54.55 r0 top
X501 "SX2M32.768KM20F30TNN" "OSC SMD_2.5x2.0 (SCTF)" 60.1,35.1 r0 top
X800 "X322525MOB4SI" OSC_SMD_3.2x2.5(YXC) 20.2,38.7 r90 top

## Footprints (in the part's own frame and the unit in brackets; to place one, negate y for a bottom-side part, rotate by r counter-clockwise, add the part's x,y. Pads: shape width x height; smd on the part's side, far side on the other; paste and mask are expansions set on the pad)
"CAP 0603 (0201_INCH)" [mm] "Chip Capacitor, 2-Leads, Body 0.60x0.30mm, IPC Medium Density"
  rect 0.4x0.35 smd mask+0.04: 1(-0.31,0) 2(0.31,0)
  silkscreen extent -0.67,-0.33 0.67,0.33, body extent -0.3,-0.15 0.3,0.15, height 0.3